# Altium PCB 630-DC2044B_REV01_DESIGN_LAYOUT.PcbDoc (part 1 of 2)
Units mil, origin at the board's own origin, x right, y up, seen from the top; angles counter-clockwise.
Board outline 3850 x 4475 mil, 4 copper layers (L1-TOP, L2- PGND/SGND-PLANE, L3-PGND/SGND-PLANE, L4-BOTTOM), stack 63.2 mil thick; 129 components, 57 nets, 276 pads, 188 vias.
Unrouted connection lines stored in the file: 3.
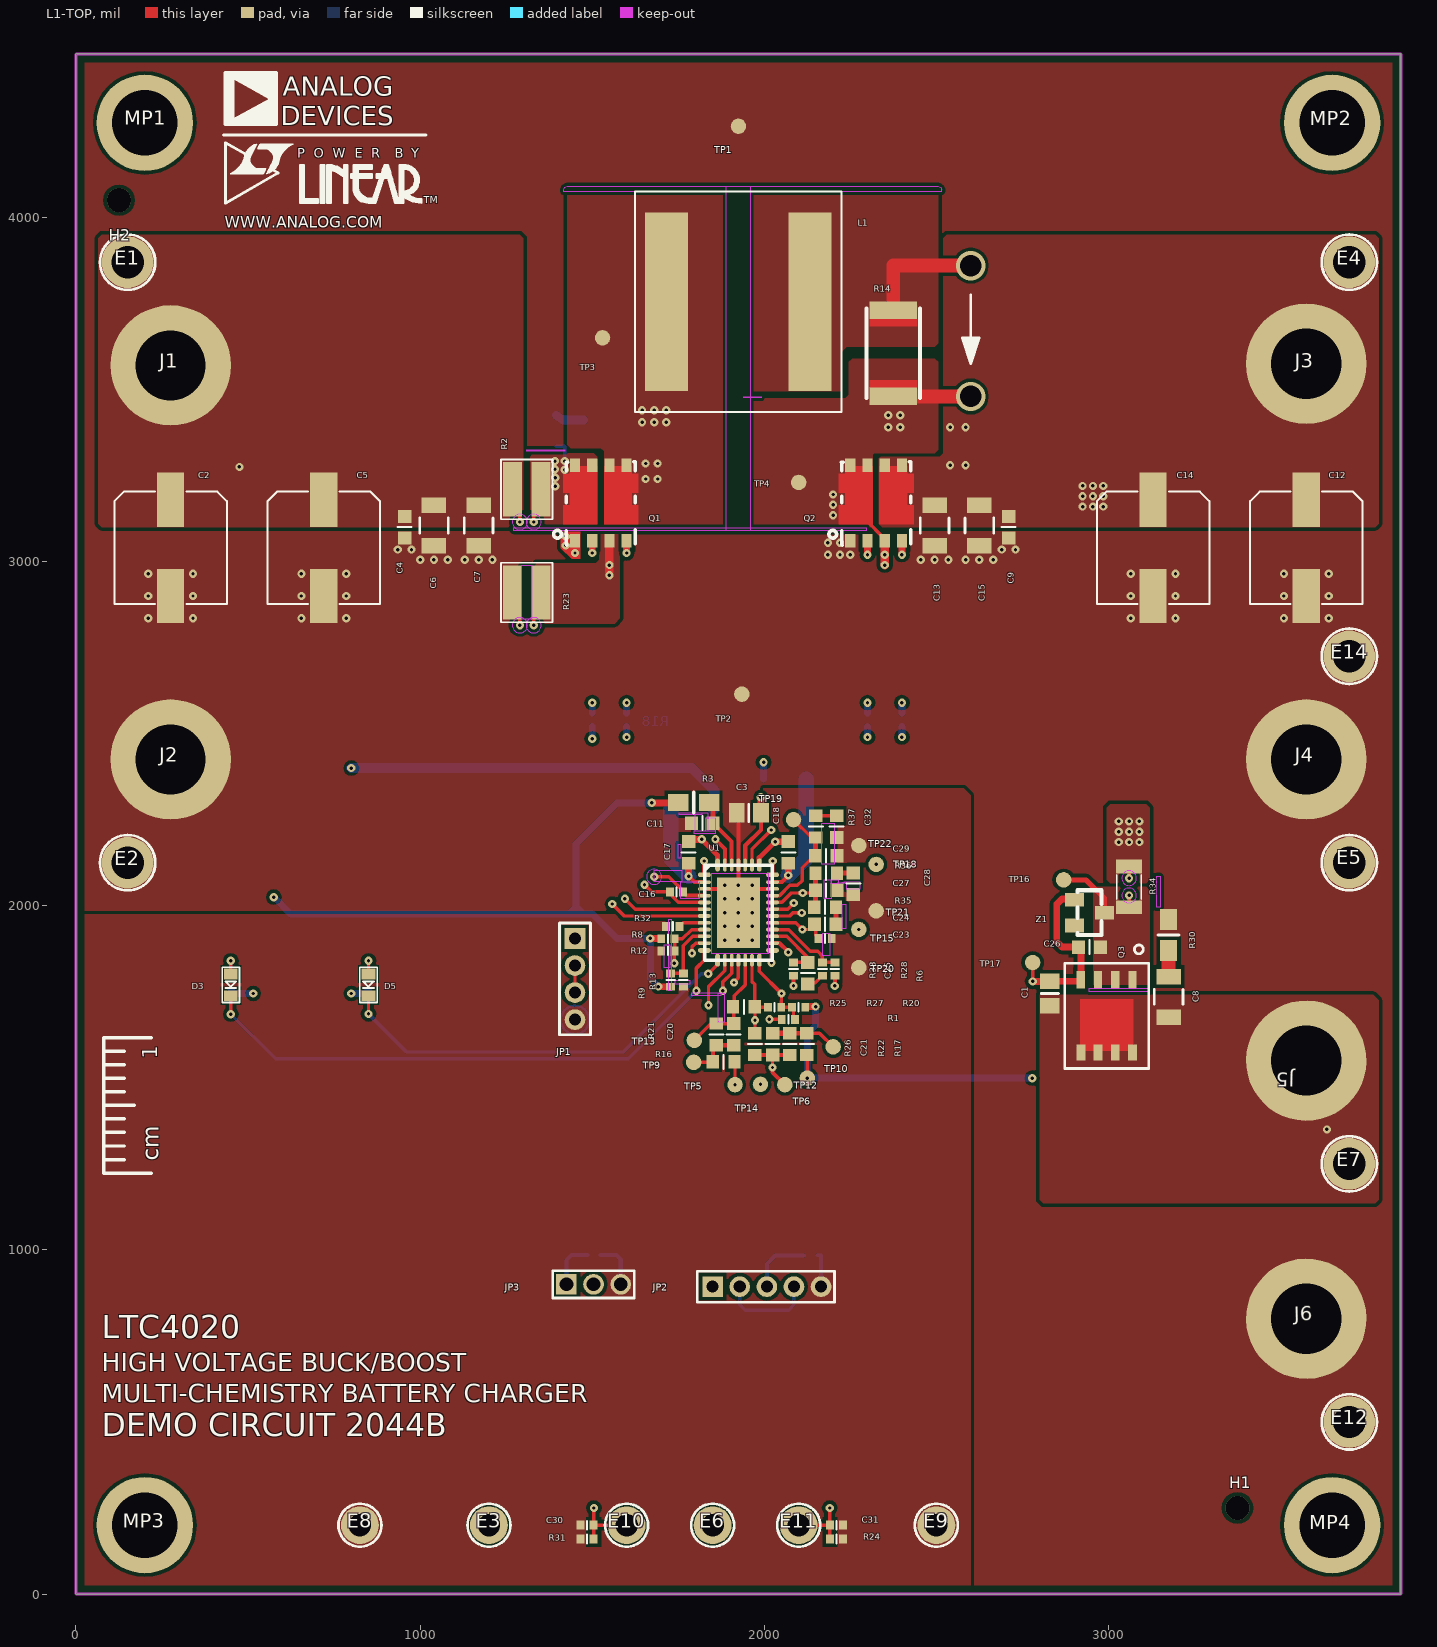
[diagram p0: L1-TOP view]
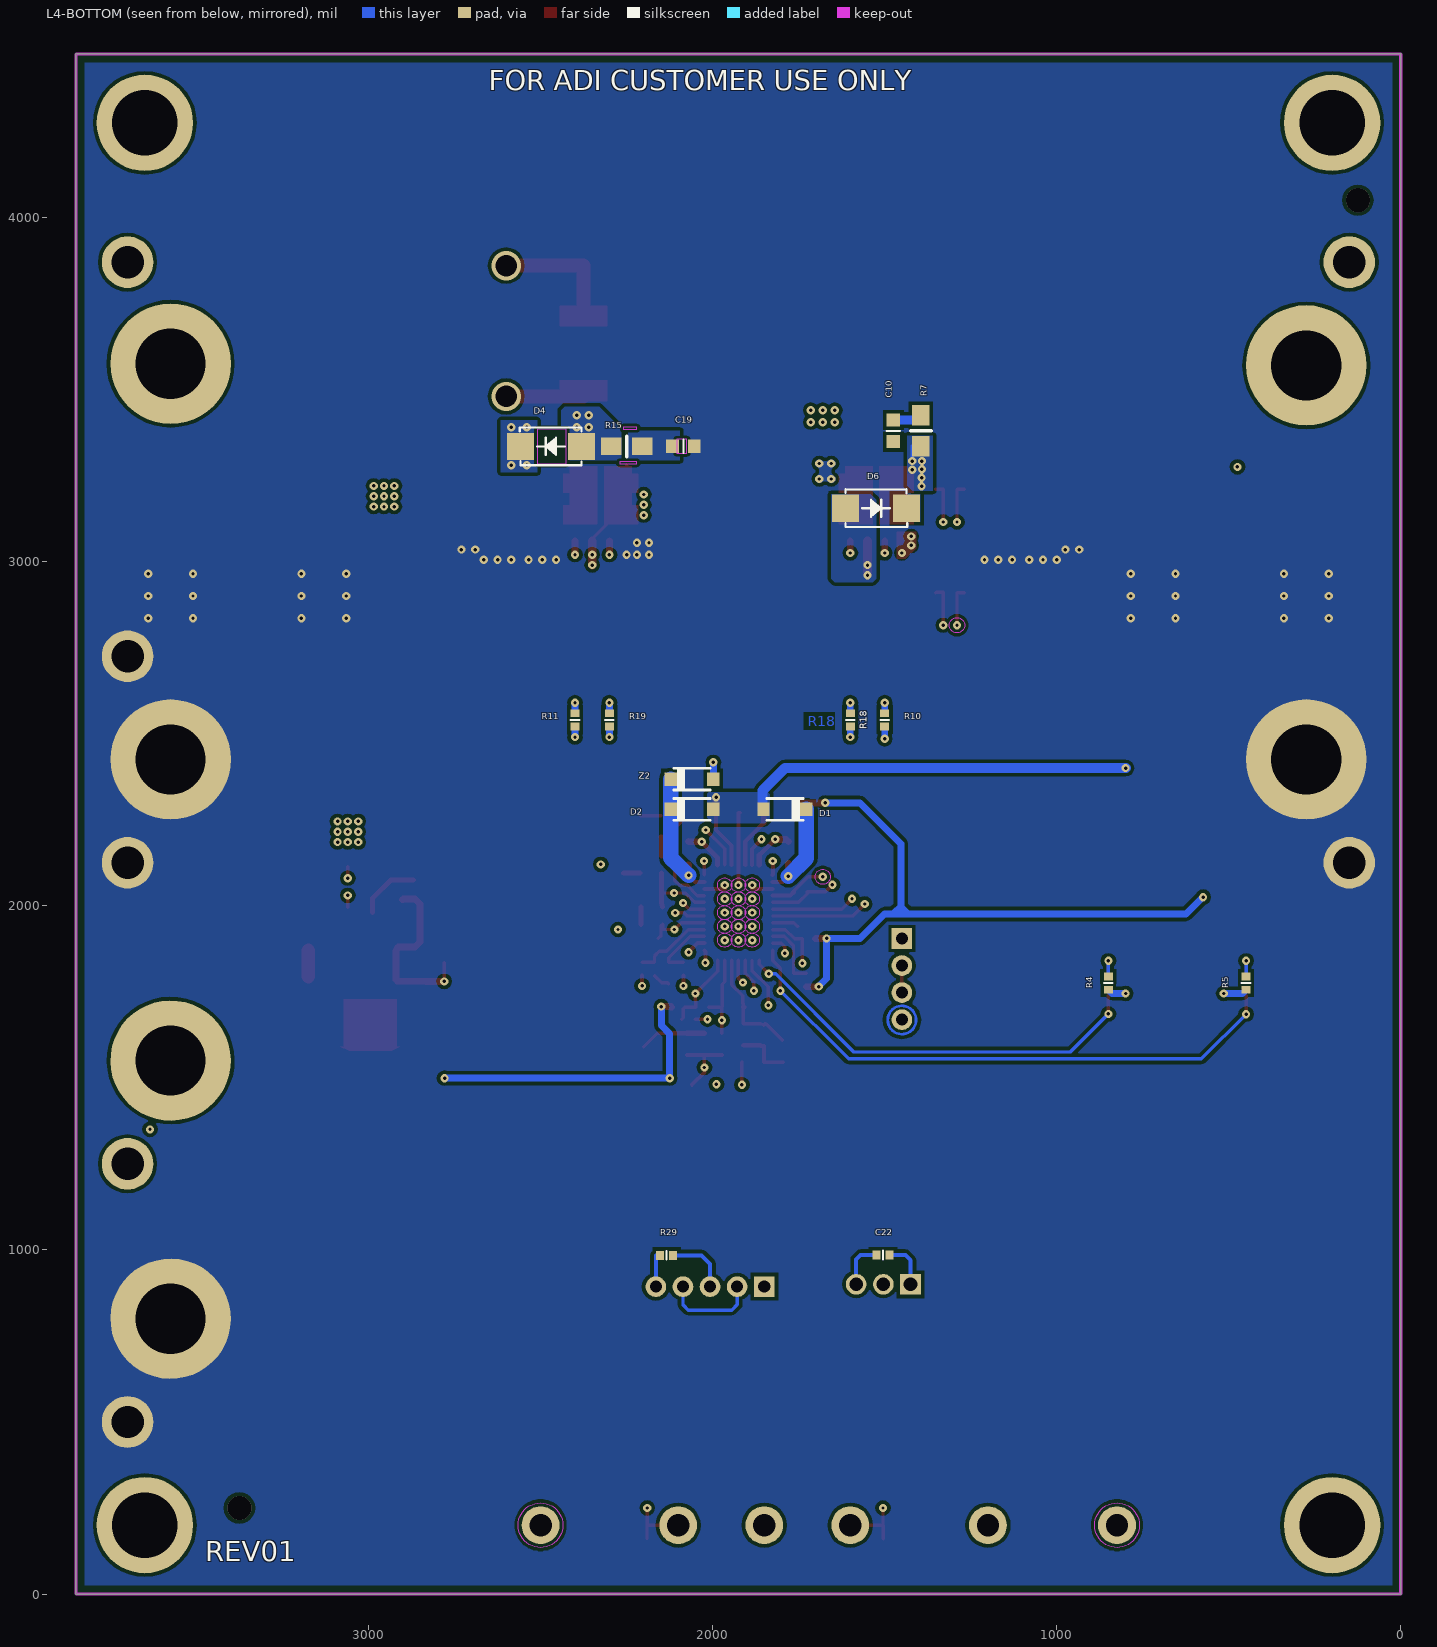
[diagram p1: L4-BOTTOM view, seen from below]
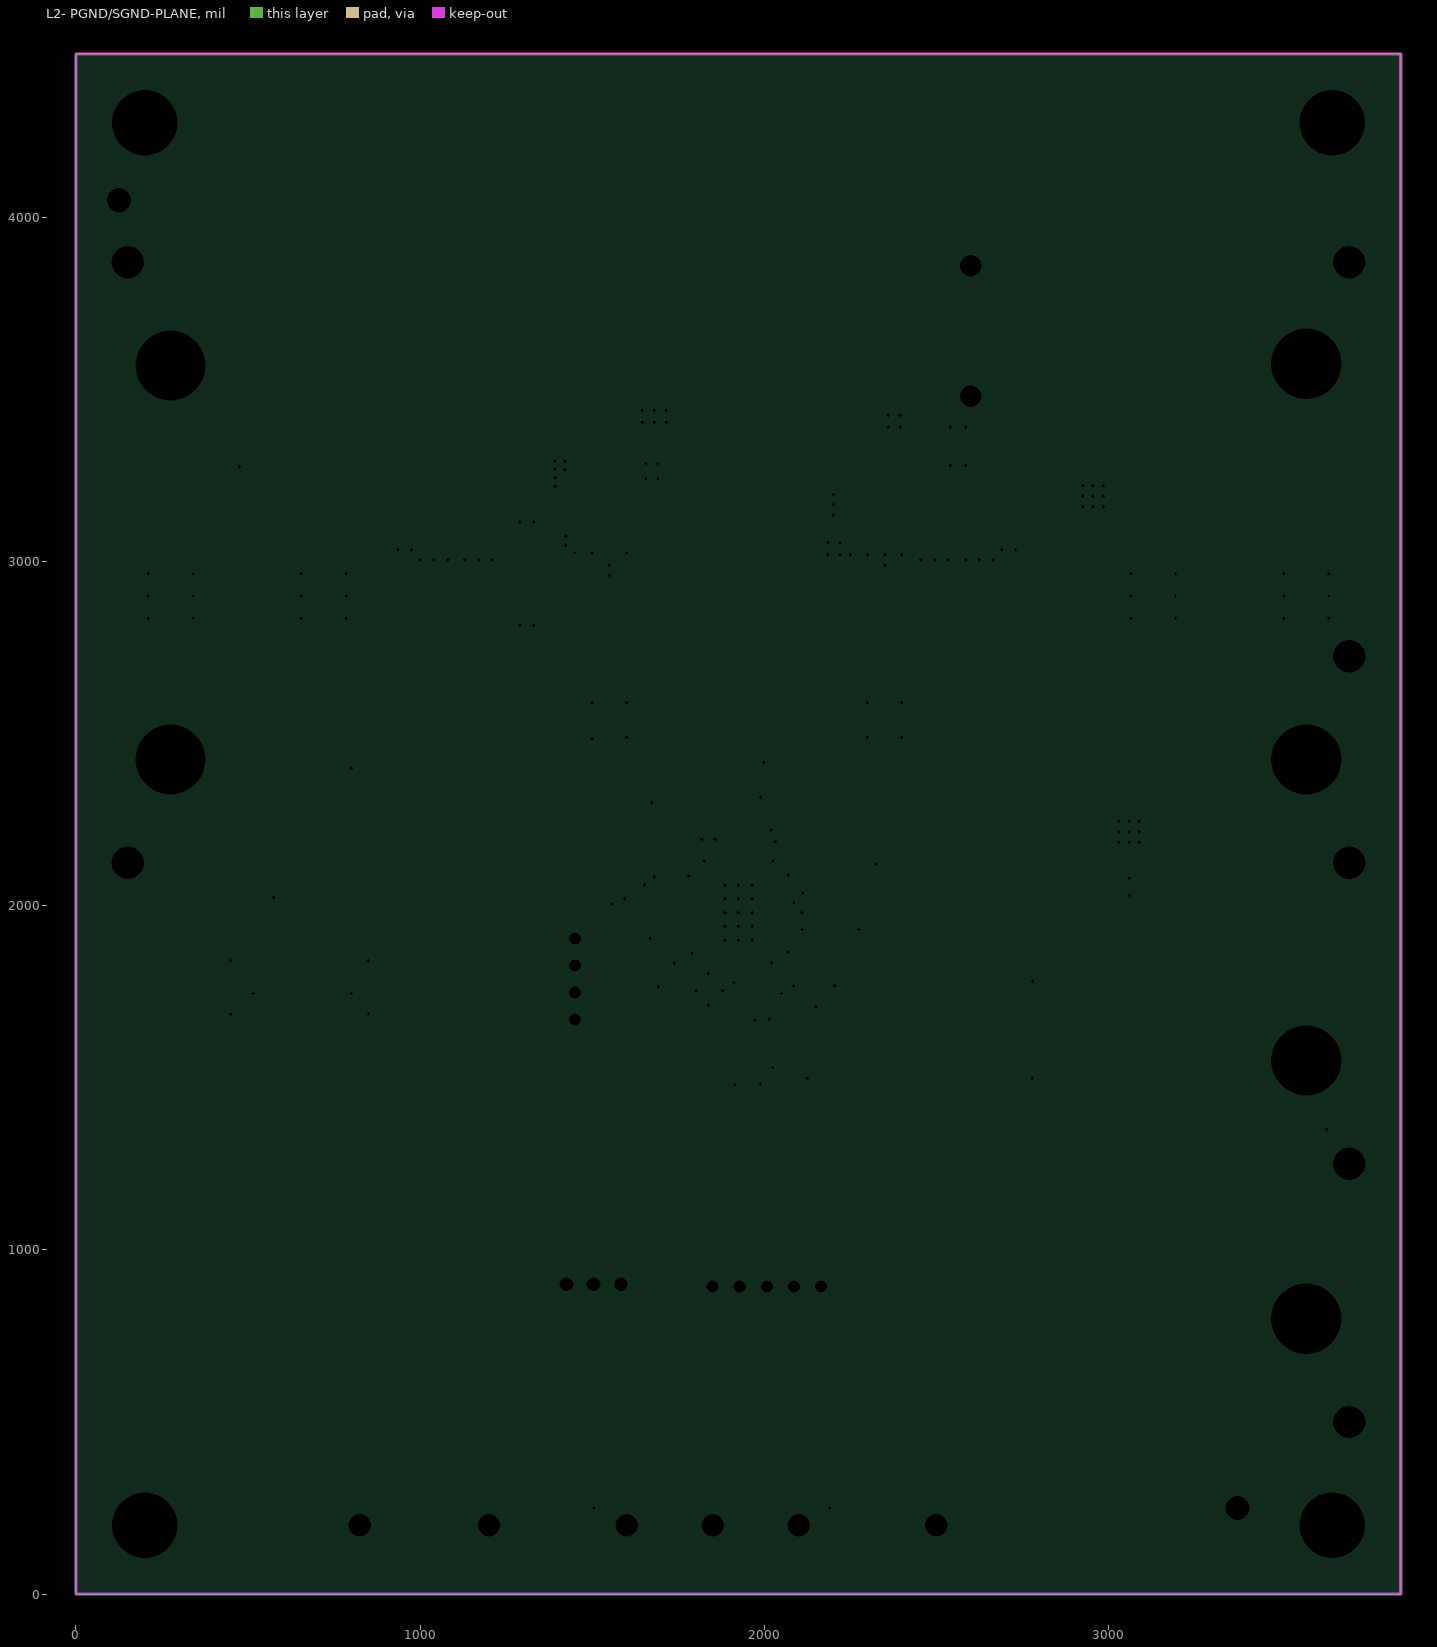
[diagram p2: L2- PGND/SGND-PLANE, clearances drawn from the general rule]
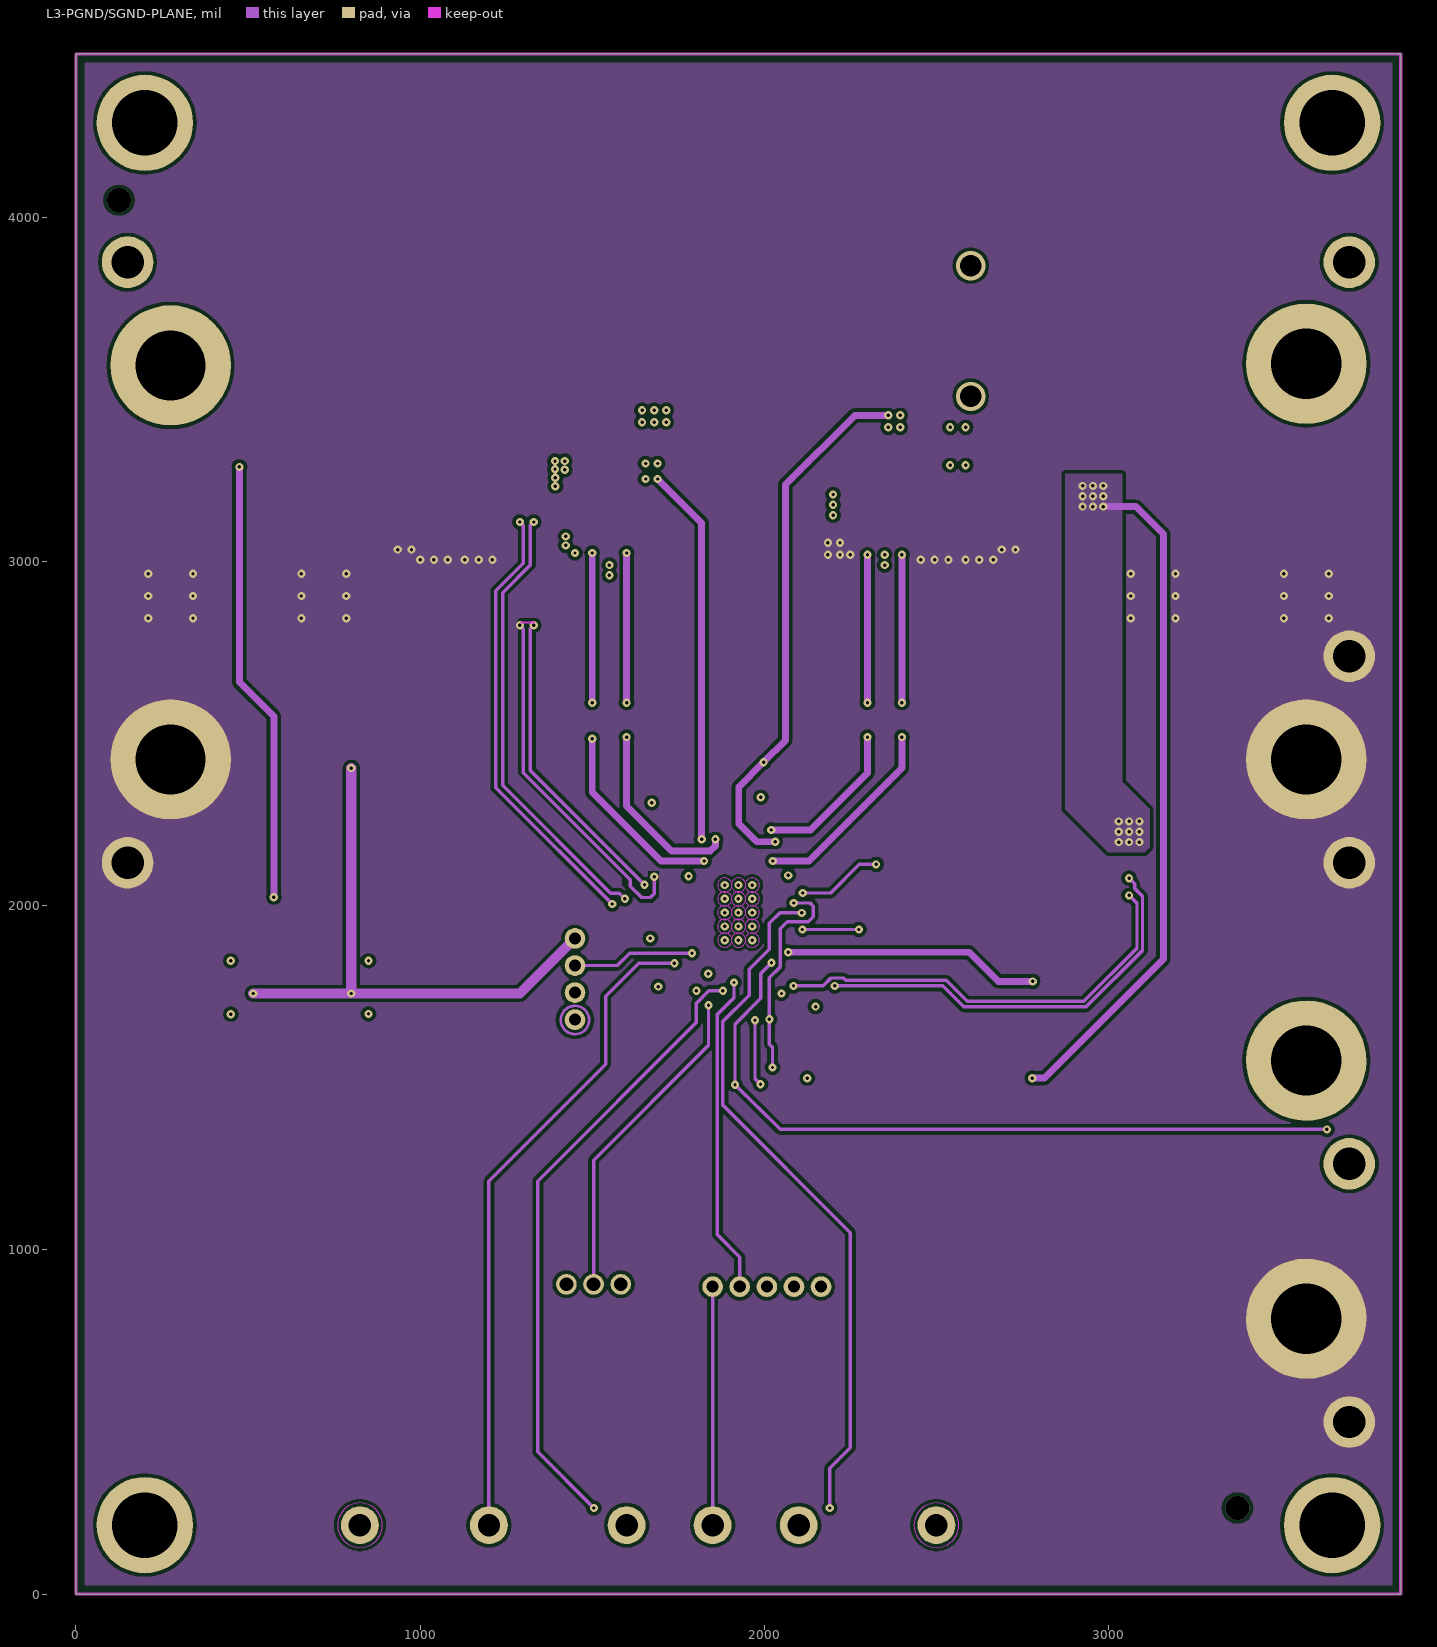
[diagram p3: L3-PGND/SGND-PLANE]

## Layer stack, top to bottom
Solder Mask Top: solder mask 0.4, Solder Resist, Dk 3.5
L1-TOP: signal copper 2.8
Dielectric 1: dielectric 12, FR-4, Dk 4.3
L2- PGND/SGND-PLANE: plane copper 2.8
Dielectric2: dielectric 28, FR-4, Dk 3.3
L3-PGND/SGND-PLANE: signal copper 2.8
Dielectric3: dielectric 12, FR-4, Dk 3.3
L4-BOTTOM: signal copper 2.8
Solder Mask Bottom: solder mask 0.4, Solder Resist, Dk 3.5

## Board outline
0,0 3850,0 3850,4475 0,4475

## Design rules (kind name [scope] priority, off if disabled: settings)
Clearance "Clearance - Net - INTVCC" [InNet('INTVCC')] p1: gap=6 ignorepadtopadclearanceinfootprint=FALSE except(9: Arc-Fill Arc-Poly Arc-Region Track-Fill Track-Poly Track-Region SMDPad-Fill SMDPad-Poly SMDPad-Region THPad-Fill THPad-Poly THPad-Region; 10: Arc-Hole Track-Hole SMDPad-Hole THPad-Hole Via-Fill Via-Poly Via-Region Via-Hole Fill-Fill Fill-Poly Fill-Region Fill-Hole Poly-Poly Poly-Region Poly-Hole Region-Region Region-Hole Text-Text Text-Hole)
Clearance "Clearance - Default - DEFAULT - Via" [IsVia vs IsVia] p2: gap=6 ignorepadtopadclearanceinfootprint=FALSE
Clearance "Clearance - Default - DEFAULT- SMD" [IsVia vs IsSMTPin] p3: gap=6 ignorepadtopadclearanceinfootprint=FALSE
Clearance "Clearance - Default - DEFAULT - Net" [All] p4: gap=10 ignorepadtopadclearanceinfootprint=FALSE except(6: Arc-Arc Arc-Track Arc-SMDPad Arc-THPad Arc-Via Arc-Text Track-Track Track-SMDPad Track-THPad Track-Via Track-Text SMDPad-SMDPad SMDPad-THPad SMDPad-Via SMDPad-Text THPad-THPad THPad-Via THPad-Text Via-Via Via-Text Fill-Text Poly-Text Region-Text)
ComponentClearance "ComponentClearance - Default - DEFAULT" [All] p1: gap=6 collisioncheckmode=3 verticalgap=10 showdistances=FALSE
FanoutControl Fanout_SOIC [IsSOIC] p1: bgadir=Out bgaviamode=Centered fanoutstyle=Auto fanoutdirection=Alternating viagrid=1 // Fanout_SOIC (Default Rule)
FanoutControl Fanout_Small [(CompPinCount < 5)] p2: bgadir=Out bgaviamode=Centered fanoutstyle=Auto fanoutdirection=OutThenIn viagrid=1 // Fanout_Small (Default Rule)
FanoutControl Fanout_LCC [IsLCC] p3: bgadir=Out bgaviamode=Centered fanoutstyle=Auto fanoutdirection=Alternating viagrid=1 // Fanout_LCC (Default Rule)
FanoutControl Fanout_BGA [IsBGA] p4: bgadir=Out bgaviamode=Centered fanoutstyle=Auto fanoutdirection=Alternating viagrid=1 // Fanout_BGA (Default Rule)
HoleToHoleClearance "HoleToHoleClearance - Default - DEFAULT" [All] p1: gap=6 allowstackedmicrovias=TRUE
Length "Default Length" [All] p1: maxlimit=50000 minlimit=0
MaxMinImpedance "Default Impedance" [All] p1: minimum=50.00 maximum=150.0
ParallelSegment "Default Parallel Segment Adjasent" [All] p1: limit=1000 gap=200
ParallelSegment "Default Parallel Segment Same Layer" [All] p2: limit=1000 gap=200
PlaneClearance [All] p1: clearance=20
PlaneConnect "Default PlaneConnect" [All] p1: planeconnectstyle=Direct reliefexpansion=20 reliefentries=4 reliefconductorwidth=15 reliefairgap=10
PolygonConnect "PolygonConnect - Default SMT" [IsSMTPin] p1: connectstyle=Direct reliefconductorwidth=10 reliefentries=4 polygonreliefangle="45 Angle" airgapwidth=10
PolygonConnect "PolygonConnect - Default Pad" [All] p2: connectstyle=Direct reliefconductorwidth=15 reliefentries=4 polygonreliefangle="45 Angle" airgapwidth=10
RoutingLayers "RoutingLayers - Default - DEFAULT" [All] p1: top layer_v5=TRUE mid layer 1_v5=TRUE bottom layer_v5=TRUE
RoutingPriority "RoutingPriority - Default - DEFAULT" [All] p1: routingpriority=4
RoutingTopology "Default Routing Topology" [All] p1: topology=Shortest
RoutingVias "RoutingVias - Default - DEFAULT" [All] p1: holewidth=63 width=85 viastyle="Through Hole" minholewidth=63 minwidth=85 maxholewidth=63 maxwidth=85
SMDToCorner "SMDToCorner - Default - DEFAULT" [All] p1: distance=60000
SolderMaskExpansion "SolderMaskExpansion from CAM settings" [All] p1: expansion=1 istentingtop=FALSE
Width "Width - Net - INTVCC" [InNet('INTVCC')] p1: maxlimit=100 minlimit=9 preferedwidth=10
Width "Width - NetClass - ClearanceClass_2(RuleSet)" [InNetClass('ClearanceClass_2(RuleSet)')] p2: maxlimit=100 minlimit=9 preferedwidth=10
Width "Default Width" [All] p3: maxlimit=100 minlimit=10 preferedwidth=10
19 further rules are at their usual default settings.

## Classes and differential pairs
net class ClearanceClass_2(RuleSet): BAT BST2 GND_POWER ILIMIT N16590650 QAD RNGSS SHDN VIN VOUT

## Components (designator, comment, footprint, x,y, rotation, side; value= is the part's Value field where it differs from the comment)
C1 "CC0805N" CC0805N 2830,1745 r270 top
C2 "PANASONIC_ZA_8X10.2" PANASONIC_ZA_8X10.2 275,3040 r0 top
C3 "CC0805N" CC0805N 1955,2270 r180 top
C4 "CC0603N" CC0603N 955,3100 r270 top
C5 "PANASONIC_ZA_8X10.2" PANASONIC_ZA_8X10.2 720,3040 r0 top
C6 "CC1206NB" CC1206NB 1040,3105 r270 top
C7 "CC1206NB" CC1206NB 1170,3105 r270 top
C8 "CC1206NAAA" CC1206NAAA 3175,1735 r90 top
C9 "CC0603N" CC0603N 2710,3100 r270 top
C10 "CC0603N" CC0603N 1475,3380 r90 bottom
C11 "CC0603N" CC0603N 1820,2240 r180 top
C12 "PANASONIC_ZA_8X10.2" PANASONIC_ZA_8X10.2 3575,3040 r0 top
C13 "CC1206NB" CC1206NB 2495,3105 r270 top
C14 "PANASONIC_ZA_8X10.2" PANASONIC_ZA_8X10.2 3130,3040 r0 top
C15 "CC1206NB" CC1206NB 2625,3105 r270 top
C16 "CC0402N" CC0402N 1745,2040 r0 top
C17 "CC0603NA" CC0603NA 1780,2155 r90 top
C18 "CC0603NA" CC0603NA 2070,2155 r90 top
C19 "CC0603ND" CC0603ND 2085,3335 r0 bottom
C20 "CC0603NA" CC0603NA 1911,1626 r90 top
C21 "CC0603NA" CC0603NA 2024,1598 r270 top
C22 "CC0402N" CC0402N 1505,985 r0 bottom
C23 "CC0402N" CC0402N 2177,1905 r0 top
C24 "CC0603NA" CC0603NA 2177,1946 r0 top
C25 "CC0603NA" CC0603NA 2127,1804 r90 top
C26 "CC0603NEA" CC0603NEA 2945,1880 r180 top
C27 "CC0603NA" CC0603NA 2180,2045 r0 top
C28 "CC0603NABA" CC0603NABA 2259,2064 r270 top
C29 "CC0603NA" CC0603NA 2180,2145 r0 top
C30 "CC0402NAA" CC0402NAA 1485,200 r180 top
C31 "CC0402NAA" CC0402NAA 2210,200 r0 top
C32 "CC0603NA" CC0603NA 2210,2230 r270 top
D1 "SOD-123N" SOD-123N 1790,2280 r0 bottom
D2 "SOD-123N" SOD-123N 2060,2280 r180 bottom
D3 "LED_0603" LED_0603 450,1770 r270 top
D4 "SMA-N" SMA-N 2470,3335 r180 bottom
D5 "LED_0603" LED_0603 850,1770 r270 top
D6 "SMA-N" SMA-N 1525,3155 r0 bottom
E1 "MILLMAX2501" MILLMAX2501 150,3870 r0 top
E2 "MILLMAX2501" MILLMAX2501 150,2125 r0 top
E3 "MILLMAX2308" MILLMAX2308 1200,200 r0 top
E4 "MILLMAX2501" MILLMAX2501 3700,3870 r0 top
E5 "MILLMAX2501" MILLMAX2501 3700,2125 r0 top
E6 "MILLMAX2308" MILLMAX2308 1850,200 r0 top
E7 "MILLMAX2501" MILLMAX2501 3700,1250 r0 top
E8 "MILLMAX2308" MILLMAX2308 825,200 r0 top
E9 "MILLMAX2308" MILLMAX2308 2500,200 r0 top
E10 "MILLMAX2308" MILLMAX2308 1600,200 r0 top
E11 "MILLMAX2308" MILLMAX2308 2100,200 r0 top
E12 "MILLMAX2501" MILLMAX2501 3700,500 r0 top
E14 "MILLMAX2501" MILLMAX2501 3700,2725 r0 top
H1 "PAD070-070" PAD070-070 3375,250 r0 top
H2 "PAD070-070" PAD070-070 125,4050 r0 top
J1 "KEY-575-4" KEY-575-4 275,3570 r0 top
J2 "KEY-575-4" KEY-575-4 275,2425 r0 top
J3 "KEY-575-4" KEY-575-4 3575,3575 r0 top
J4 "KEY-575-4" KEY-575-4 3575,2425 r0 top
J5 "KEY-575-4" KEY-575-4 3575,1550 r359 top
J6 "KEY-575-4" KEY-575-4 3575,800 r1 top
JP1 "HD1X4-079" HD1X4-079 1450,1905 r270 top
JP2 "HD1X5-079" HD1X5-079 1850,893 r0 top
JP3 "HD1X3-079" HD1X3-079 1425,900 r0 top
L1 "COILCRAFT-XAL1510" COILCRAFT-XAL1510 1925,3755 r0 top
MP1 "MTG-8831" MTG-8831 200,4275 r0 top
MP2 "MTG-8831" MTG-8831 3650,4275 r0 top
MP3 "MTG-8831" MTG-8831 200,200 r0 top
MP4 "MTG-8831" MTG-8831 3650,200 r0 top
Q1 "ONSEMI-DFN8-SO-8FL" ONSEMI-DFN8-SO-8FL 1525,3170 r0 top
Q2 "ONSEMI-DFN8-SO-8FL" ONSEMI-DFN8-SO-8FL 2325,3170 r0 top
Q3 "VISHAY_PPAK_SO-8" VISHAY_PPAK_SO-8 2995,1680 r270 top
R1 "CR0402N" CR0402N 2070,1670 r180 top
R2 "SUSUMU-PRL1632" SUSUMU-PRL1632 1310,3210 r0 top
R3 "CR0805M" CR0805M 1795,2300 r0 top
R4 "CR0402N" CR0402N 850,1775 r90 bottom
R5 "CR0402N" CR0402N 450,1775 r90 bottom
R6 "CR0402N" CR0402N 2205,1816 r270 top
R7 "CR0805M" CR0805M 1395,3380 r270 bottom
R8 "CR0402N" CR0402N 1720,1904 r0 top
R9 "CR0402N" CR0402N 1728,1784 r90 top
R10 "CR0402N" CR0402N 1500,2540 r90 bottom
R11 "CR0402N" CR0402N 2400,2540 r90 bottom
R12 "CR0402N" CR0402N 1720,1869 r180 top
R13 "CR0402N" CR0402N 1765,1784 r270 top
R14 "VISHAY-WSL_9-2512" VISHAY-WSL_9-2512 2375,3605 r270 top
R15 "CR0805M" CR0805M 2249.97,3335 r0 bottom
R16 "CR0603NA" CR0603NA 1882,1546 r180 top
R17 "CR0603NA" CR0603NA 2124,1598 r90 top
R18 "CR0402N" CR0402N 1600,2540 r90 bottom
R19 "CR0402N" CR0402N 2300,2540 r90 bottom
R20 "CR0402N" CR0402N 2100,1705 r180 top
R21 "CR0603NA" CR0603NA 1861,1626 r90 top
R22 "CR0603NA" CR0603NA 2074,1598 r270 top
R23 "SUSUMU-PRL1632" SUSUMU-PRL1632 1310,2910 r180 top
R24 "CR0402NAAAA" CR0402NAAAA 2210,160 r0 top
R25 "CR0603NA" CR0603NA 1941,1706 r0 top
R26 "CR0603NA" CR0603NA 1973,1598 r90 top
R27 "CR0402N" CR0402N 2030,1705 r180 top
R28 "CR0402N" CR0402N 2169,1816 r270 top
R29 "CR0402N" CR0402N 2134,984 r0 bottom
R30 "CR0805MAA" CR0805MAA 3175,1915 r90 top
R31 "CR0402NAAAA" CR0402NAAAA 1485,160 r180 top
R32 "CR0402N" CR0402N 1734,1940 r180 top
R33 "CR0402N" CR0402N 2085,1816 r270 top
R34 "SUSUMU-KRL1632" SUSUMU-KRL1632 3060,2055 r270 top
R35 "CR0603NA" CR0603NA 2177,1996 r180 top
R36 "CR0603NA" CR0603NA 2180,2095 r0 top
R37 "CR0603NA" CR0603NA 2150,2230 r90 top
TP1 "PADSTYLE1C" PADSTYLE1C 1925,4265 r0 top
TP2 "PADSTYLE1C" PADSTYLE1C 1935,2615 r0 top
TP3 "PADSTYLE1" PADSTYLE1 1530,3650 r0 top
TP4 "PADSTYLE1" PADSTYLE1 2100,3230 r0 top
TP5 "PADSTYLE1" PADSTYLE1 1915,1480 r0 top
TP6 "PADSTYLE1" PADSTYLE1 2125,1499 r0 top
TP9 "PADSTYLE1" PADSTYLE1 1795,1545 r0 top
TP10 "PADSTYLE1" PADSTYLE1 2200,1590 r0 top
TP12 "PADSTYLE1" PADSTYLE1 2060,1480 r0 top
TP13 "PADSTYLE1" PADSTYLE1 1797,1609 r0 top
TP14 "PADSTYLE1" PADSTYLE1 1989,1481 r0 top
TP15 "PADSTYLE1" PADSTYLE1 2275,1931 r0 top
TP16 "PADSTYLE1" PADSTYLE1 2870,2075 r270 top
TP17 "PADSTYLE1" PADSTYLE1 2780,1835 r270 top
TP18 "PADSTYLE1" PADSTYLE1 2325,2120 r0 top
TP19 "PADSTYLE1" PADSTYLE1 2085,2250 r0 top
TP20 "PADSTYLE1A" PADSTYLE1A 2275,1820 r0 top
TP21 "PADSTYLE1B" PADSTYLE1B 2325,1985 r0 top
TP22 "PADSTYLE1C" PADSTYLE1C 2275,2175 r0 top
U1 "LTC-QFN-38-1701" LTC-QFN-38-1701 1925,1980 r0 top
Z1 "SOT23-3NAA" SOT23-3NAA 2945,1980 r270 top
Z2 "SOD-123N" SOD-123N 2060,2368 r180 bottom

## Footprints (in the part's own frame and the unit in brackets; to place one, negate y for a bottom-side part, rotate by r counter-clockwise, add the part's x,y. Pads: shape width x height; smd on the part's side, far side on the other; paste and mask are expansions set on the pad)
CC0402N [mm]
  rect 0.58x0.66 smd: 1(-0.49,0) 2(0.49,0)
  silkscreen extent 0,-0.32 0,0.32
CC0402NAA [mm]
  rect 0.58x0.66 smd: 1(-0.49,0) 2(0.49,0)
  silkscreen extent 0,-0.32 0,0.32
CC0603N [mm]
  rect 0.95x1 smd: 1(-0.8,0) 2(0.8,0)
  silkscreen extent 0,-0.51 0,0.51
CC0603NA [mm]
  rect 0.95x1 smd: 1(-0.8,0) 2(0.8,0)
  silkscreen extent 0,-0.51 0,0.51
CC0603NABA [mm]
  rect 0.95x1 smd: 1(-0.8,0) 2(0.8,0)
  silkscreen extent 0,-0.51 0,0.51
CC0603ND [mm]
  rect 0.95x1 smd: 1(-0.8,0) 2(0.8,0)
  silkscreen extent 0,-0.51 0,0.51
CC0603NEA [mm]
  rect 0.95x1 smd: 1(-0.8,0) 2(0.8,0)
  silkscreen extent 0,-0.51 0,0.51
CC0805N [mm]
  rect 1.15x1.45 smd: 1(-0.9,0) 2(0.9,0)
  silkscreen extent 0,-0.64 0,0.64
CC1206NAAA [mm]
  rect 1.15x1.8 smd: 1(-1.5,0) 2(1.5,0)
  silkscreen extent -0.55,-1.05 0.55,1.05
CC1206NB [mm]
  rect 1.15x1.8 smd: 1(-1.5,0) 2(1.5,0)
  silkscreen extent -0.55,-1.05 0.55,1.05
COILCRAFT-XAL1510 [mil]
  rect 125x520 smd: 1(-208.5,0) 2(208.5,0)
  silkscreen extent -300,-320 300,320
CR0402N [mm]
  rect 0.58x0.66 smd: 1(-0.49,0) 2(0.49,0)
  silkscreen extent 0,-0.32 0,0.32
CR0402NAAAA [mm]
  rect 0.58x0.66 smd: 1(-0.49,0) 2(0.49,0)
  silkscreen extent 0,-0.32 0,0.32
CR0603NA [mm]
  rect 0.9x1 smd: 1(-0.8,0) 2(0.8,0)
  silkscreen extent 0,-0.51 0,0.51
CR0805M [mil]
  rect 60x50 smd: 1(-45,0) 2(45,0)
  silkscreen extent 0,-30 0,30
CR0805MAA [mil]
  rect 60x50 smd: 1(-45,0) 2(45,0)
  silkscreen extent 0,-30 0,30
HD1X3-079 [mil]
  rect 60x60 / inner round 60 / far side rect 60x60 hole 40: 1(0,0)
  round 60 hole 40: 2(79,0) 3(158,0)
  silkscreen extent -40,-40 198,40
HD1X4-079 [mil]
  rect 60x60 / inner round 60 / far side rect 60x60 hole 35: 1(0,0)
  round 60 hole 35: 2(78.74,0) 3(157.48,0) 4(236.22,0)
  silkscreen extent -45,-45 280,45
HD1X5-079 [mil]
  rect 60x60 / inner round 60 / far side rect 60x60 hole 35: 1(0,0)
  round 60 hole 35: 2(78.74,0) 3(157.48,0) 4(236.22,0) 5(314.96,0)
  silkscreen extent -45,-45 354,45
KEY-575-4 [mil]
  round 350 hole 204: 1(0,0)
LED_0603 [mm]
  rect 0.8x1 smd: 1(0.8,0) 2(-0.8,0)
  silkscreen extent -1.3,-0.64 1.3,0.64
LTC-QFN-38-1701 [mm]
  oval 0.95x0.35 smd: 1(-2.515,2.79) 12(-2.515,-2.79) 20(2.515,-2.79) 31(2.515,2.79)
  oval 0.95x0.27 smd: 2(-2.515,2.25) 3(-2.515,1.75) 4(-2.515,1.25) 5(-2.515,0.75) 6(-2.515,0.25) 7(-2.515,-0.25) 8(-2.515,-0.75) 9(-2.515,-1.25) 10(-2.515,-1.75) 11(-2.515,-2.25) 21(2.515,-2.25) 22(2.515,-1.75) 23(2.515,-1.25) 24(2.515,-0.75) 25(2.515,-0.25) 26(2.515,0.25) 27(2.515,0.75) 28(2.515,1.25) 29(2.515,1.75) 30(2.515,2.25)
  oval 0.35x0.95 smd: 13(-1.54,-3.515) 19(1.54,-3.515) 32(1.54,3.515) 38(-1.54,3.515)
  oval 0.27x0.95 smd: 14(-1,-3.515) 15(-0.5,-3.515) 16(0,-3.515) 17(0.5,-3.515) 18(1,-3.515) 33(1,3.515) 34(0.5,3.515) 35(0,3.515) 36(-0.5,3.515) 37(-1,3.515)
  rect 3.2x5.2 smd: 39(0,0)
  silkscreen extent -2.5,-3.5 2.5,3.5
MILLMAX2308 [mil]
  round 110 hole 65: 1(0,0)
  silkscreen extent -62,-62 62,62
MILLMAX2501 [mil]
  round 150 hole 94: 1(0,0)
  silkscreen extent -80,-80 80,80
MTG-8831 [mil]
  round 280 hole 190: 1(0,0)
ONSEMI-DFN8-SO-8FL [mm]
  rect 0.75x1 smd: 1(-1.905,-2.795) 2(-0.635,-2.795) 3(0.635,-2.795) 4(1.905,-2.795) 5(1.905,2.795) 6(0.635,2.795) 7(-0.635,2.795) 8(-1.905,2.795)
  L1-TOP region: -0.25,-1.55 -0.25,2.735 -2.285,2.735 -2.285,2.15 -2.775,2.15 -2.775,0.75 -2.28,0.75 -2.28,-0.15 -2.775,-0.15 -2.775,-1.55 -0.25,-1.55
  L1-TOP region: 0.25,-1.55 0.25,2.735 2.285,2.735 2.285,2.15 2.775,2.15 2.775,0.75 2.28,0.75 2.28,-0.15 2.775,-0.15 2.775,-1.55 0.25,-1.55
  silkscreen extent -3.48,-3.1 2.55,3.05
PAD070-070 [mil]
  round 70 hole 70 unplated: 1(0,0)
PADSTYLE1 [mil]
  round 45 smd: 1(0,0)
PADSTYLE1A [mil]
  round 45 smd: 1(0,0)
PADSTYLE1B [mil]
  round 45 smd: 1(0,0)
PADSTYLE1C [mil]
  round 45 smd: 1(0,0)
PANASONIC_ZA_8X10.2 [mm]
  rect 2x4 smd: 1(0,3.55) 2(0,-3.55)
  silkscreen extent -4.15,-4.15 4.15,4.15
SMA-N [mm]
  rrect0% 2x2 smd: 1(-2.25,0) 2(2.25,0)
  silkscreen extent -2.3,-1.4 2.25,1.4
SOD-123N [mm]
  rect 0.9x1 smd: 1(-1.575,0) 2(1.575,0)
  silkscreen extent -1.35,-0.8 1.35,0.8
SOT23-3NAA [mm]
  rect 1x1.4 smd: 1(-0.95,-1.1) 2(0.95,-1.1) 3(0,1.1)
  silkscreen extent -1.65,-0.89 1.65,0.89
SUSUMU-KRL1632 [mm]
  rect 1x1.9 smd: 1(-1.5,0) 2(1.5,0)
  silkscreen extent -0.9,-0.9 0.9,0.9
SUSUMU-PRL1632 [mm]
  rect 1.4x4 smd: 1(-1.05,0) 2(1.05,0)
  silkscreen extent -1.9,-2.2 1.9,2.2
VISHAY-WSL_9-2512 [mm]
  rect 1.3x3.5 smd: 1(-3.175,0) 2(3.175,0)
  L1-TOP region: 2,1.75 3.522,1.75 3.522,-1.75 2,-1.75 2,1.75
  L1-TOP region: -3.522,1.75 -2,1.75 -2,-1.75 -3.522,-1.75 -3.522,1.75
  silkscreen extent -3.3,-1.98 3.3,1.98
VISHAY_PPAK_SO-8 [mm]
  rect 1.27x0.61 smd: 1(-2.667,1.905) 2(-2.667,0.635) 3(-2.667,-0.635) 4(-2.667,-1.905)
  rect 1.2x0.65 smd: 5(2.71,1.9) 6(2.7,0.635) 7(2.7,-0.635) 8(2.7,-1.9)
  L1-TOP region: 2.286,2.21 2.591,1.6 2.591,-1.6 2.286,-2.21 2.286,-1.956 -1.219,-1.956 -1.219,1.956 2.286,1.956 2.286,2.21
  silkscreen extent -5.23,-3.1 3.89,3.1

## Via types
v1: diameter 24, hole 10, L1-TOP to L4-BOTTOM, 186 vias
v2: diameter 85, hole 63, L1-TOP to L4-BOTTOM, 2 vias

## Nets (pads, with @x,y where several pads share a name; then routed paths per layer and width w, separated by ;. In a path a pad name is that pad's centre, name@x,y a point inside that pad or via, vN(x,y) a via of type N, cw(c..) or ccw(c..) an arc to the next point about the centre after c; other vN are vias at no path point)
BAT: C1.2 C8.1 E7.1 J5.1 Q3.5 Q3.6 Q3.7 Q3.8 R16.1 TP5.1 U1.20 | length 2275.5
  L1-TOP w10: R16.1@1913.5,1546 1915,1544.5 v1(1915,1480)
  L1-TOP w12: v1(2021,1834) 2021,1867.14 U1.20@2024.02,1870.16
  L3-PGND/SGND-PLANE w10: v1(2021,1834) 1990,1803 1990,1731 1915,1656 v1(1915,1480) 2046,1350 v1(3635,1350)
BG1: R18.1 U1.37 | length 654.2
  L1-TOP w12: v1(1858,2193) 1885.63,2165.37 U1.37@1885.63,2118.39
  L3-PGND/SGND-PLANE w20: v1(1600,2490) 1600,2290 1731,2159 1843,2159 1858,2174 v1(1858,2193)
  L4-BOTTOM w20: v1(1600,2490) R18.1@1600,2520.71
BG2: R19.1 U1.33 | length 609.1
  L1-TOP w10: U1.33@1964.37,2118.39 1964.37,2165 1965,2165 v1(2020,2220)
  L3-PGND/SGND-PLANE w20: v1(2020,2220) 2135,2220 2300,2385 v1(2300,2490)
  L4-BOTTOM w20: v1(2300,2490) R19.1@2300,2520.71
BGATE: C1.1 C26.2 Q3.4 TP17.1 U1.21 Z1.1 | length 1339.6
  L1-TOP w10: v1(2780,1780) TP17.1@2780,1835
  L1-TOP w12: U1.21@2024.02,1891.42 2043.58,1891.42 v1(2070,1865)
  L1-TOP w20: v1(2780,1780) 2834.57,1780 C1.1@2835,1780.43 ; C1.1@2830,1780.43 C1.1@2835,1780.43 ; Z1.1@2901.69,2017.4 2899.09,2020 2865,2020 2850,2005 2850,1895 2865,1880 C26.2@2913.5,1880 2920,1868.31 Q3.4@2920,1785 2915.43,1780.43 C1.1@2835,1780.43
  L3-PGND/SGND-PLANE w20: v1(2070,1865) 2595,1865 2680,1780 v1(2780,1780)
BST1: C17.1 D1.1 U1.2 | length 306.2
  L1-TOP w12: v1(1780,2086) 1797.42,2068.58 U1.2@1825.98,2068.58
  L1-TOP w20: v1(1780,2086) C17.1@1780,2123.5
  L4-BOTTOM w45: D1.1@1727.99,2280 1727.99,2138.01 v1(1780,2086)
BST2: C18.1 D2.1 U1.30 Z2.1 | length 397.8
  L1-TOP w10: C18.1@2070,2123.5 2075,2120 C18.1@2071,2119
  L1-TOP w12: U1.30@2024.02,2068.58 2051.58,2068.58 v1(2070,2088)
  L1-TOP w20: v1(2070,2088) 2070,2117.97 C18.1@2071,2118.97
  L4-BOTTOM w45: v1(2070,2088) 2117.01,2134.01 2122.01,2139.01 D2.1@2122.01,2280 Z2.1@2122.01,2368
CSN: C25.2 R33.1 U1.22 | length 184.3
  L1-TOP w10: U1.22@2024.02,1911.1 2064.9,1911.1 2127,1849 C25.2@2127,1835.5 2126.8,1835.29 R33.1@2085,1835.29
CSOUT: C23.1 C24.1 TP15.1 U1.24 | length 354.6
  L1-TOP w10: U1.24@2024.02,1950.47 2091.53,1950.47 v1(2111,1931) 2145.5,1931 C24.1@2145.5,1946 2150,1941.5 2150,1912.71 C23.1@2157.71,1905
  L3-PGND/SGND-PLANE w10: v1(2111,1931) v1(2275,1931)
CSP: R6.1 R28.1 U1.23 | length 231.5
  L1-TOP w10: U1.23@2024.02,1930.79 2071.21,1930.79 2134,1868 2155,1868 2169,1854 R28.1@2169,1835.29 R6.1@2205,1835.29
FBG: R25.2 R26.2 R27.2 TP14.1 U1.18 | length 441.9
  L1-TOP w10: U1.18@1964.37,1841.61 1964.37,1779.63 1972.5,1771.5 R25.2@1972.5,1706 1973.5,1705 R27.2@2010.71,1705 ; R26.2@1973,1629.5 v1(1973,1667) 1973,1700.78 R25.2@1973.26,1701.04
  L3-PGND/SGND-PLANE w10: v1(1973,1667) 1973,1497 v1(1989,1481)
GND_POWER: C2.2 C3.2 C4.2 C5.2 C6.2 C7.2 C9.2 C11.2 C12.2 C13.2 C14.2 C15.2 C16.2 C19.1 E2.1 E5.1 E12.1 E14.1 J2.1 J4.1 J6.1 Q2.1 R23.2 R30.2 TP1.1 TP2.1 U1.4 U1.35 | length 1475.1
  L1-TOP w10: R23.2@1268.66,2910 1290,2910 v1(1290,2815) ; v1(1680,2084) 1723,2084 1767,2040 C16.2@1764.29,2040 ; C3.2@1919.57,2270 C3.2@1925,2270
  L1-TOP w12: C16.2@1764.29,2040 1764.29,2039.21 1774.29,2029.21 U1.4@1825.98,2029.21 ; U1.35@1925,2118.39 C3.2@1925,2270
  L3-PGND/SGND-PLANE w10: v1(1290,2815) 1300,2805 1300,2387 1611,2076 1611,2057 1644,2024 1669,2024 1680,2035 v1(1680,2084)
  other v1: 210,2835 340,2835 655,2835 785,2835 3065,2835 3195,2835 3510,2835 3640,2835 210,2900 340,2900 655,2900 785,2900 3065,2900 3195,2900 3510,2900 3640,2900 210,2965 340,2965 655,2965 785,2965 3065,2965 3195,2965 3510,2965 3640,2965 1000,3005 1040,3005 1080,3005 1130,3005 1170,3005 1210,3005 2455,3005 2495,3005 2535,3005 2585,3005 2625,3005 2665,3005 2185,3020 2220,3020 2250,3020 935,3035 975,3035 2690,3035 2730,3035 2185,3055 2220,3055
GND_SIGNAL: C22.2 C23.2 C27.2 C28.2 C29.2 C30.2 C31.2 C32.2 E8.1 E9.1 JP1.4 JP2.5 JP3.3 R12.2 R13.2 R24.2 R29.2 R31.2 R32.2 TP20.1 TP21.1 TP22.1 U1.3 U1.29 U1.39 | length 381.2
  L1-TOP w10: U1.39@1872,2048.9 1886,2048.9 1886,2059 v1(1885,2060) ; U1.39@1965,2048.9 v1(1965,2060)
  L1-TOP w12: U1.3@1825.98,2048.9 U1.39@1872,2048.9 ; U1.39@1965,2048.9 U1.29@2024.02,2048.9
  L4-BOTTOM w10: R29.2@2153.29,984 2165.5,984 2164.96,983.46
  L4-BOTTOM w12: C22.2@1524.29,985 1570,985 1583,972 JP3.3@1583,900 ; JP2.5@2164.96,893 2164.96,983.46
  other v1: 1885,1900 1925,1900 1965,1900 1885,1940 1925,1940 1965,1940 1885,1980 1925,1980 1965,1980 1885,2020 1925,2020 1965,2020 1925,2060
ILIMIT: C31.1 E11.1 R24.1 U1.25 | length 2309.1
  L1-TOP w10: U1.25@2024.02,1970.16 2074.16,1970.16 2083,1979 v1(2109,1979) ; E11.1@2100,200 C31.1@2190.71,200 ; v1(2190,250) 2190,200.71 C31.1@2190.71,200 ; R24.1@2190.71,160 C31.1@2190.71,200
  L3-PGND/SGND-PLANE w10: v1(2109,1979) 2045,1979 2015,1949 2015,1874 1956,1815 1956,1740 1880,1664 1880,1420 2250,1050 2250,425 2190,365 v1(2190,250)
INTVCC: C3.1 D1.2 D2.2 JP1.1 R4.1 R5.1 U1.34 | length 3134.4
  L1-TOP w12: U1.34@1944.68,2118.39 1944.68,2174.68 1990.43,2220.43 C3.1@1990.43,2270
  L1-TOP w20: v1(1990,2315) 1990,2270.43 C3.1@1990.43,2270
  L3-PGND/SGND-PLANE w30: v1(515,1745) v1(800,1745) ; v1(800,2400) v1(800,1745) ; JP1.1@1450,1905 1290,1745 v1(800,1745)
  L4-BOTTOM w20: R5.1@450,1755.71 460.71,1745 v1(515,1745) ; v1(800,1745) 839.29,1745 R4.1@850,1755.71
  L4-BOTTOM w30: v1(800,2400) 1790,2400 1855,2335 1855,2282.01 D1.2@1852.01,2280
ITH: C27.1 R35.2 R36.1 TP18.1 U1.27 | length 482.6
  L1-TOP w10: U1.27@2024.02,2009.53 2051.53,2009.53 2079,2037 v1(2112,2037) C27.1@2148.5,2037
  L1-TOP w15: R35.2@2145.5,1996 2148.5,2007 2148.5,2037 C27.1@2148.5,2045 R36.1@2148.5,2095
  L3-PGND/SGND-PLANE w10: v1(2112,2037) 2193,2037 2194,2038 2276.1,2120 v1(2325,2120)
MODE: JP1.2 JP1.3 U1.11 | length 492.8
  L1-TOP w10: JP1.3@1450,1747.52 JP1.2@1450,1826.26 ; v1(1790,1862) 1790,1881 1800.42,1891.42 U1.11@1825.98,1891.42
  L3-PGND/SGND-PLANE w10: JP1.2@1450,1826.26 1573.26,1826.26 1609,1862 v1(1790,1862)
N16559762: C20.1 R16.2 R21.1 TP9.1 | length 165.8
  L1-TOP w10: TP9.1@1795,1545 1850.51,1545 1850.75,1545.24 1850.75,1545.76 R16.2@1850.5,1546
  L1-TOP w12: R16.2@1850.5,1546 1850.5,1591.95 1861.08,1591.95 R21.1@1861,1594.5 C20.1@1911,1594.5
N16563575: C32.1 R37.2 | length 60
  L1-TOP w10: R37.2@2150,2261.5 C32.1@2210,2261.5
N16563579: C28.1 R36.2 | length 47.7
  L1-TOP w15: R36.2@2211.5,2095 2258.5,2095 C28.1@2259,2095.5
N16567930: C24.2 R35.1 | length 50
  L1-TOP w15: C24.2@2208.5,1946 R35.1@2208.5,1996
N16574178: C21.1 R17.2 R22.1 TP10.1 | length 192.4
  L1-TOP w10: R17.2@2118,1629.5 R17.2@2124,1629.5 2160.5,1629.5 TP10.1@2200,1590
  L1-TOP w12: R22.1@2074,1629.5 R17.2@2118,1629.5
  L1-TOP w15: C21.1@2024,1629.5 R22.1@2074,1629.5
N16590650: C16.1 D6.2 Q1.3 R23.1 U1.5 | length 1312
  L1-TOP w10: v1(1330,2815) 1330,2911 1350.34,2911 R23.1@1351.34,2910 ; v1(1652,2061) 1673,2040 C16.1@1725.71,2040 1725.71,2034.29 1750.47,2009.53 U1.5@1825.98,2009.53
  L1-TOP w25: v1(1550,2960) v1(1550,2990) Q1.3@1550,3059.96
  L3-PGND/SGND-PLANE w10: v1(1330,2815) 1320,2805 1320,2393 v1(1652,2061)
N16591324: C10.2 R7.1 | length 84.1
  L4-BOTTOM w25: R7.1@1395,3425 1415,3411.5 C10.2@1475,3411.5
N16591456: C19.2 R15.1
N16600107: D3.1 U1.12 | length 1669
  L1-TOP w10: v1(450,1685) D3.1@450,1738.5 ; v1(1803,1753) 1803,1818.99 1825.98,1841.99 U1.12@1825.98,1870.16
  L4-BOTTOM w10: v1(450,1685) 580,1555 1605,1555 v1(1803,1753)
N16600116: D5.1 U1.13 | length 1230.8
  L1-TOP w10: v1(850,1685.5) D5.1@850,1738.5 ; v1(1837,1802) 1864.37,1829.37 U1.13@1864.37,1841.61
  L4-BOTTOM w10: v1(850,1685.5) 960.5,1575 1590,1575 1817,1802 v1(1837,1802)
N16621792: C26.1 Q3.1 Q3.2 Q3.3 R33.2 R34.2 TP16.1 Z1.3 | length 1508.3
  L1-TOP w10: R34.2@3060,1995.94 v1(3060,2030)
  L1-TOP w12: v1(2085,1767) R33.2@2085,1796.71
  L1-TOP w15: TP16.1@2870,2075 2935,2075 2988.31,2021.69 Z1.3@2988.31,1980
  L3-PGND/SGND-PLANE w10: v1(2085,1767) 2171,1767 2194,1790 2230,1790 2237,1783 2529,1783 2590,1722 2928,1722 3083,1877 3083,2007 v1(3060,2030)
N16768872: E6.1 JP2.1 | length 693
  L3-PGND/SGND-PLANE w10: E6.1@1850,200 JP2.1@1850,893
N16771108: L1.2 R14.1 | length 355
  L1-TOP w40: R14.1@2375,3730 2375,3860 v2(2600,3860)
N16813716: C22.1 JP3.1 | length 136.9
  L4-BOTTOM w12: JP3.1@1425,900 1425,970 1440,985 C22.1@1485.71,985
N16858640: C11.1 R3.2 U1.36 | length 193.9
  L1-TOP w12: C11.1@1851.5,2240 1905.32,2186.18 U1.36@1905.32,2118.39
  L1-TOP w15: C11.1@1851.5,2240 R3.2@1851.5,2290
N16860808: D5.2 R4.2 | length 84.2
  L1-TOP w10: D5.2@850,1801.5 v1(850,1840)
  L4-BOTTOM w10: R4.2@850,1794.29 v1(850,1840)
N16860845: D3.2 R5.2 | length 84.2
  L1-TOP w10: D3.2@450,1801.5 v1(450,1840)
  L4-BOTTOM w10: R5.2@450,1794.29 v1(450,1840)
N16865080: JP2.3 R29.1 | length 183.9
  L4-BOTTOM w12: JP2.3@2007.48,893 2007.48,959.48 2032,984 R29.1@2114.71,984
N16868558: C25.1 R28.2 | length 52
  L1-TOP w10: C25.1@2127,1772.5 2130.5,1776 2148.29,1776 R28.2@2169,1796.71
N16868867: Q1.2 R10.2 | length 500.7
  L1-TOP w20: v1(1500,3025) Q1.2@1500,3059.96
  L3-PGND/SGND-PLANE w20: v1(1500,2590) v1(1500,3025)
  L4-BOTTOM w20: R10.2@1500,2559.29 v1(1500,2590)
N16872134: Q2.4 R11.2 | length 500.7
  L1-TOP w20: v1(2400,3020) Q2.4@2400,3059.96
  L3-PGND/SGND-PLANE w20: v1(2400,2590) v1(2400,3020)
  L4-BOTTOM w20: R11.2@2400,2559.29 v1(2400,2590)
N16872774: Q2.2 R19.2 | length 500.7
  L1-TOP w20: v1(2300,3020) Q2.2@2300,3059.96
  L3-PGND/SGND-PLANE w20: v1(2300,2590) v1(2300,3020)
  L4-BOTTOM w20: R19.2@2300,2559.29 v1(2300,2590)
N16881464: C8.2 R30.1 | length 75.9
  L1-TOP w40: C8.2@3175,1794.06 R30.1@3175,1870
N16903155: Q1.4 R18.2 | length 500.7
  L1-TOP w20: v1(1600,3025) Q1.4@1600,3059.96
  L3-PGND/SGND-PLANE w20: v1(1600,2590) v1(1600,3025)
  L4-BOTTOM w20: R18.2@1600,2559.29 v1(1600,2590)
NTC: JP2.2 JP2.4 U1.16 | length 1275.8
  L1-TOP w10: v1(1912,1777) 1925,1790 U1.16@1925,1841.61
  L3-PGND/SGND-PLANE w10: v1(1912,1777) 1912,1733 1864,1685 1864,1044 1928.74,979 JP2.2@1928.74,893
  L4-BOTTOM w10: JP2.2@1928.74,893 1928.74,841.26 1945,825 2071.22,825 2086.22,840 JP2.4@2086.22,893
QAD: Q1.7 Q1.8 R2.2 R7.2 U1.6 | length 1722.1
  L1-TOP w10: v1(1330,3115) 1330,3210 R2.2@1351.34,3210 ; v1(1595,2020) 1625,1989.84 U1.6@1825.98,1989.84
  L3-PGND/SGND-PLANE w10: v1(1330,3115) 1320,3105 1320,2990 1240,2910 1240,2350 1550,2040 1550,2039.5 1553.5,2036 1579,2036 v1(1595,2020)
  L4-BOTTOM w10: R7.2@1395,3335 1420,3335 v1(1420,3292)
  other v1: 1393,3219 1393,3244 1420,3267 1392,3268 1392,3292
RNGSS: C30.1 E10.1 R31.1 U1.15 | length 2102.5
  L1-TOP w10: R31.1@1504.29,160 C30.1@1504.29,200 ; v1(1505,250) 1505,200.71 C30.1@1504.29,200 ; E10.1@1600,200 C30.1@1504.29,200 ; v1(1880,1753) 1880,1779 1905.32,1804.32 U1.15@1905.32,1841.61
  L3-PGND/SGND-PLANE w10: v1(1505,250) 1342,413 1342,1200 1803,1661 1803,1717 1839,1753 v1(1880,1753)
RT: R32.1 U1.8 | length 77
  L1-TOP w10: R32.1@1753.29,1940 1753.82,1940 1764.29,1950.47 U1.8@1825.98,1950.47
SHDN: E3.1 R8.2 R12.1 U1.9 | length 2089.2
  L1-TOP w10: v1(1739,1833) R12.1@1739,1866 ; U1.9@1825.98,1930.79 1788.79,1930.79 1762,1904 R8.2@1739.29,1904 R12.1@1739.29,1869 ; R12.1@1739,1866 1739,1868.71 R12.1@1739.29,1869 ; R12.1@1739,1866 1739.29,1866.29 R12.1@1739.29,1869
  L3-PGND/SGND-PLANE w10: E3.1@1200,200 1200,1200 1539,1539 1539,1737 1635,1833 v1(1739,1833)
SW1: C10.1 C17.2 D6.1 L1.1 Q1.1 Q1.5 Q1.6 TP3.1 U1.38 | length 1309.5
  L1-TOP w10: v1(1423,3047) 1423,3059.96 Q1.1@1450,3059.96 v1(1450,3025)
  L1-TOP w15: v1(1818,2193) 1864.37,2146.63 U1.38@1864.37,2118.39
  L1-TOP w20: C17.2@1780,2186.5 1786.5,2193 v1(1818,2193)
  L3-PGND/SGND-PLANE w20: v1(1690,3240) 1818,3112 v1(1818,2193)
  other v1: 1423,3073 1655,3240 1655,3285 1690,3285 1645,3405 1680,3405 1715,3405 1645,3440 1680,3440 1715,3440
SW2: C18.2 D4.2 Q2.3 Q2.7 Q2.8 R14.2 R15.2 TP4.1 U1.32 Z2.2 | length 2314.2
  L1-TOP w10: Q2.8@2250,3280.04 2245,3117 2299,3117 2345,3071 Q2.3@2350,3059.96
  L1-TOP w15: U1.32@1985.63,2118.39 1985.63,2139.63 v1(2032,2186)
  L1-TOP w20: v1(2032,2186) 2064.5,2186 C18.2@2070,2186.5
  L1-TOP w25: v1(2350,2990) v1(2350,3020) Q2.3@2350,3059.96
  L1-TOP w40: R14.2@2375,3480 v2(2600,3480)
  L3-PGND/SGND-PLANE w20: v1(2032,2186) 1978,2186 1926,2238 1926,2345 v1(1998,2417) 2061.5,2480.5 2061.5,3223.5 2263,3425 v1(2360,3425)
  L4-BOTTOM w20: Z2.2@1997.99,2368 v1(1998,2417)
  other v1: 2200,3135 2200,3165 2200,3195 2360,3390 2395,3390 2395,3425
TG1: R10.1 U1.1 | length 639.1
  L1-TOP w12: v1(1825,2130) 1825,2090.83 U1.1@1825.98,2089.84
  L3-PGND/SGND-PLANE w20: v1(1500,2485) 1500,2330 1700,2130 v1(1825,2130)
  L4-BOTTOM w20: v1(1500,2485) R10.1@1500,2520.71
TG2: R11.1 U1.31 | length 648.1
  L1-TOP w10: U1.31@2024.02,2089.84 2024.51,2090.33 2024.51,2090.49 2025,2090.98 v1(2025,2130)
  L3-PGND/SGND-PLANE w20: v1(2025,2130) 2130,2130 2400,2400 v1(2400,2490)
  L4-BOTTOM w20: v1(2400,2490) R11.1@2400,2520.71
TIMER: JP3.2 U1.14 | length 1099.7
  L1-TOP w10: v1(1838,1711) 1838,1764 1885.63,1811.63 U1.14@1885.63,1841.61
  L3-PGND/SGND-PLANE w10: JP3.2@1504,900 1504,1261 1838,1595 v1(1838,1711)
VC: C29.1 R37.1 TP19.1 U1.28 | length 334.9
  L1-TOP w10: U1.28@2024.02,2029.21 2044.21,2029.21 2074,2059 2096,2059 2110,2073 2110,2110 2145,2145 C29.1@2148.5,2145 ; TP19.1@2085,2250 2136,2199 2149.5,2199 R37.1@2150,2198.5
  L1-TOP w15: C29.1@2148.5,2145 2148.5,2198 2149.01,2198.5 R37.1@2149.5,2199
VFB: C20.2 R21.2 R25.1 TP13.1 U1.17 | length 334.7
  L1-TOP w10: TP13.1@1797,1609 1845,1657 1847.98,1657 1851.84,1653.13 R21.2@1861,1657.5 C20.2@1911,1657.5 1911,1703.48 R25.1@1909.61,1704.87 ; R25.1@1909.5,1706 1912.98,1719.41 1912.98,1737.98 1944.68,1769.68 U1.17@1944.68,1841.61
  L1-TOP w15: R25.1@1909.5,1706 R25.1@1909.61,1704.87
VFBMAX: C21.2 R1.2 R22.2 R26.1 TP12.1 U1.26 | length 928.5
  L1-TOP w10: v1(2015,1670) R1.2@2050.71,1670 ; v1(2024,1530) C21.2@2024,1566.5 ; U1.26@2024.02,1989.84 2068,1989.84 2068,1990 v1(2086,2008)
  L1-TOP w12: R26.1@1973,1566.5 C21.2@2024,1566.5 R22.2@2074,1566.5 ; v1(2024,1530) 2024,1516 TP12.1@2060,1480
  L3-PGND/SGND-PLANE w10: v1(2024,1530) 2024,1589 2015,1598 v1(2015,1670) 2015,1791 2046,1822 2046,1933 2067,1954 2128,1954 2142,1968 2142,1999 2133,2008 v1(2086,2008)
VFBMIN: R1.1 R20.2 R27.1 U1.19 | length 233.3
  L1-TOP w10: U1.19@1985.63,1841.61 1985.63,1809.37 v1(2050,1745) R27.1@2049.29,1705 R20.2@2080.71,1705 2085,1700.71 2085,1674.29 R1.1@2089.29,1670
VIN: C2.1 C4.1 C5.1 C6.1 C7.1 E1.1 J1.1 R2.1 R3.1 R8.1 R9.1 U1.7 | length 4949.3
  L1-TOP w10: R2.1@1268.66,3210 1290,3210 v1(1290,3115) ; v1(1558,2005) 1593,1970.16 U1.7@1825.98,1970.16
  L1-TOP w20: v1(1669,1905) 1699.71,1905 R8.1@1700.71,1904 ; v1(1673,2299) 1750,2299 R3.1@1750,2300 ; v1(1692,1765) 1692.29,1764.71 R9.1@1728,1764.71
  L3-PGND/SGND-PLANE w10: v1(1290,3115) 1300,3105 1300,2995 1220,2915 1220,2343 1244.8,2318.2 v1(1558,2005)
  L3-PGND/SGND-PLANE w20: v1(475,3275) 475,2650 575,2550 v1(575,2025)
  L4-BOTTOM w20: v1(575,2025) 624,1976 1432,1976 ; v1(1673,2299) 1572,2299 1453,2180 1453,1998 ; v1(1692,1765) 1669,1788 v1(1669,1905) 1572,1905 1501,1976 1471,1976 ; 1432,1976 1453,1997 ; 1432,1976 1453,1976 ; 1453,1976 1453,1997 ; 1453,1976 1471,1976 ; 1453,1997 1453,1998 ; 1453,1998 1471,1980 1471,1976
VINREG: R9.2 R13.1 U1.10 | length 189.9
  L1-TOP w10: R9.2@1728,1803.29 R13.1@1765,1803.29 1765,1884 1792.1,1911.1 U1.10@1825.98,1911.1
VOUT: C9.1 C12.1 C13.1 C14.1 C15.1 D4.1 E4.1 J3.1 Q2.5 Q2.6 R6.2 R17.1 R20.1 R34.1 TP6.1 | length 4215
  L1-TOP w10: R17.1@2124,1566.5 2125,1565.5 v1(2125,1499) ; v1(3060,2080) R34.1@3060,2114.06
  L1-TOP w12: v1(2205,1767) R6.2@2205,1796.71
  L1-TOP w20: R20.1@2119.29,1705 2121.29,1707 v1(2149,1707)
  L3-PGND/SGND-PLANE w10: v1(2205,1767) 2519,1767 2580,1706 2935,1706 3099,1870 3099,2027 3076,2050 3076,2064 v1(3060,2080)
  L3-PGND/SGND-PLANE w20: v1(2779,1499) 2814,1499 3160,1845 3160,3080 3080,3160 v1(2985,3160)
  L4-BOTTOM w20: v1(2149,1707) 2149,1652 2125,1628 v1(2125,1499) v1(2779,1499)
  other v1: 3030,2185 3060,2185 3090,2185 3030,2215 3060,2215 3090,2215 3030,2245 3060,2245 3090,2245 2925,3160 2955,3160 2925,3190 2955,3190 2985,3190 2925,3220 2955,3220 2985,3220 2540,3280 2585,3280 2540,3390 2585,3390
pads on no net: H1.1 H2.1 MP1.1 MP2.1 MP3.1 MP4.1 Z1.2
copper on no net: | length 582.7
  L1-TOP w12: 1925,2061 1925,2126
  L3-PGND/SGND-PLANE w8: 1491.19,1668 ccw(c1450,1668) 1491.19,1668
  L4-BOTTOM w8: 1491.19,1668 ccw(c1450,1668) 1491.19,1668

## Polygon pours and split planes (outlines as drawn)
VOUT on L1-TOP "L1-TOP-VOUT" (solid, remove dead copper, pour order 20): 2995,2285 3005,2295 3110,2295 3120,2285 3120,2075 3110,2065 3005,2065 2995,2075
SW1 on L1-TOP "L1-TOP-SW1" (solid, remove dead copper, pour order 6): 1438,3330 1428,3340 1428,4080 1890,4080 1890,3115 1875,3100 1535,3100 1535,3320 1525,3330
VIN on L1-TOP "L1-TOP-VIN" (solid, remove dead copper, pour order 8): 75,3950 65,3940 65,3110 75,3100 1290,3100 1300,3110 1300,3940 1290,3950
QAD on L1-TOP "L1-TOP-QAD" (solid, remove dead copper, pour order 19): 1320,3305 1330,3315 1505,3315 1515,3305 1515,3100 1330,3100 1320,3110
GND_SIGNAL on L1-TOP "L1-TOP-GND_SIGNAL" (solid, remove dead copper, pour order 10): 25,1975 1825,1975 1825,2100 1953,2100 1953,2331 1963,2341 2580,2341 2600,2321 2600,25 25,25
BAT on L1-TOP "L1-TOP-BAT" (solid, remove dead copper, pour order 9): 2800,1741 3769,1741 3785,1725 3785,1145 3775,1135 2810,1135 2800,1145
N16621792 on L1-TOP "L1-TOP-N16621792" (solid, remove dead copper, pour order 14): 2966,1757 2956,1767 2956,2045 2966,2055 3110,2055 3120,2045 3120,1767 3110,1757
GND_POWER on L1-TOP "L1-TOP-GND_POWER" (solid, remove dead copper, pour order 21): 3825,4450 25,4450 25,25 3825,25
N16590650 on L1-TOP "L1-TOP-N16590650" (solid, remove dead copper, pour order 5): 1320,2990 1325,2995 1510,2995 1520,3005 1520,3080 1580,3080 1580,2835 1565,2820 1320,2820
N16771108 on L1-TOP "L1-TOP-N16771108" (solid, remove dead copper, pour order 4): 1959,4075 1959,3495 2225,3495 2225,3610 2240,3625 2495,3625 2505,3635 2505,4075
SW2 on L1-TOP "L1-TOP-SW2" (solid, remove dead copper, pour order 1): 2505,3580 2495,3590 2255,3590 2245,3580 2245,3485 2235,3475 1969,3475 1959,3465 1959,3115 1974,3100 2315,3100 2315,3310 2320,3315 2495,3315 2505,3325
VOUT on L1-TOP "L1-TOP-VOUT 1" (solid, remove dead copper, pour order 0): 2343,3100 2333,3110 2333,3300 2338,3305 2510,3305 2520,3315 2520,3940 2530,3950 3775,3950 3785,3940 3785,3110 3775,3100
SW1 on L4-BOTTOM "L4-BOTTOM-SW1" (solid, remove dead copper, pour order 18): 1445,3370 1445,3220 1420,3195 1395,3195 1390,3190 1390,3040 1425,3005 1465,3005 1475,3015 1475,3095 1515,3135 1515,3185 1535,3205 1708,3205 1718,3215 1718,3297 1645,3370
GND_POWER on L4-BOTTOM "L4-BOTTOM-GND_POWER" (solid, remove dead copper, pour order 17): 3825,4450 25,4450 25,25 3825,25
VOUT on L4-BOTTOM "L4-BOTTOM-VOUT" (solid, remove dead copper, pour order 16): 2510,3410 2615,3410 2615,3260 2510,3260
QAD on L4-BOTTOM "L4-BOTTOM-QAD" (solid, remove dead copper, pour order 15): 1360,3365 1435,3365 1435,3221 1420,3206 1360,3206
INTVCC on L4-BOTTOM "L4-BOTTOM-INTVCC" (solid, remove dead copper, pour order 12): 1834,2324 1840,2330 2011,2330 2016,2325 2016,2255 2001,2240 1848,2240 1834,2254
N16591456 on L4-BOTTOM "L4-BOTTOM-N16591456" (solid, remove dead copper, pour order 11): 2095,3380 2245,3380 2245,3295 2095,3295
SW2 on L4-BOTTOM "L4-BOTTOM-SW2" (solid, remove dead copper, pour order 7): 2265,3385 2330,3450 2430,3450 2440,3440 2440,3295 2265,3295
N16590650 on L4-BOTTOM "L4-BOTTOM-N16590650" (solid, remove dead copper, pour order 2): 1655,3195 1540,3195 1525,3180 1525,2950 1535,2940 1645,2940 1655,2950
GND_POWER on L3-PGND/SGND-PLANE "L3-PGND/SGND-PLANE-GND_POWER" (solid, remove dead copper, pour order 13): 3825,4450 25,4450 25,25 3825,25
VOUT on L3-PGND/SGND-PLANE "L3-PGND/SGND-PLANE-VOUT" (solid, remove dead copper, pour order 3): 3120,2170 3105,2155 3000,2155 2875,2280 2875,3255 3040,3255 3040,2360 3120,2280
GND_SIGNAL on L2- PGND/SGND-PLANE (split plane): 2594.9,2202.89 2594.9,30.1 30.1,30.1 30.1,1969.9 1775,1969.9 1776.95,1970.29 1778.6,1971.4 1798.6,1991.4 1799.71,1993.05 1800.1,1995 1800.1,2077.89 1817.11,2094.9 2030,2094.9 2031.95,2095.29 2033.6,2096.4 2053.6,2116.4 2054.71,2118.05 2055.1,2120 2055.1,2192.89 2072.11,2209.9 2587.89,2209.9
GND_POWER on L2- PGND/SGND-PLANE (split plane): 3819.9,30.1 2605.1,30.1 2605.1,2205 2604.71,2206.95 2603.6,2208.6 2593.6,2218.6 2591.95,2219.71 2590,2220.1 2070,2220.1 2068.05,2219.71 2066.4,2218.6 2046.4,2198.6 2045.29,2196.95 2044.9,2195 2044.9,2122.11 2027.89,2105.1 1815,2105.1 1813.05,2104.71 1811.4,2103.6 1791.4,2083.6 1790.29,2081.95 1789.9,2080 1789.9,1997.11 1772.89,1980.1 30.1,1980.1 30.1,4444.9 3819.9,4444.9
SW2 on L2- PGND/SGND-PLANE (split plane): 2369.9,3142.89 2369.9,2975.1 2330.1,2975.1 2330.1,3085 2329.71,3086.95 2328.6,3088.6 2313.6,3103.6 2311.95,3104.71 2310,3105.1 2202.11,3105.1 2190.1,3117.11 2190.1,3207.89 2202.11,3219.9 2292.89,3219.9
SW1 on L2- PGND/SGND-PLANE (split plane): 1706.9,3295.89 1706.9,3203.11 1694.89,3191.1 1598,3191.1 1596.05,3190.71 1594.4,3189.6 1462.4,3057.6 1461.29,3055.95 1460.9,3054 1460.9,3014.1 1440.11,3014.1 1414.1,3040.11 1414.1,3146.89 1575.11,3307.9 1694.89,3307.9

## Keep-outs
L1-TOP:
  region: 1352.2,3115 ccw(c1330,3115) 1330,3137.2 ccw(c1330,3115) 1307.8,3115 ccw(c1330,3115) 1330,3092.8 ccw(c1330,3115)
  region: 1352.2,2815 ccw(c1330,2815) 1330,2837.2 ccw(c1330,2815) 1307.8,2815 ccw(c1330,2815) 1330,2792.8 ccw(c1330,2815)
  region: 3081.26,2080 ccw(c3060,2080) 3060,2101.26 ccw(c3060,2080) 3038.74,2080 ccw(c3060,2080) 3060,2058.74 ccw(c3060,2080)
  region: 1702.02,2084 ccw(c1680,2084) 1680,2106.02 ccw(c1680,2084) 1657.98,2084 ccw(c1680,2084) 1680,2061.98 ccw(c1680,2084)
  region: 3081.26,2030 ccw(c3060,2030) 3060,2051.26 ccw(c3060,2030) 3038.74,2030 ccw(c3060,2030) 3060,2008.74 ccw(c3060,2030)
  region: 1312.2,3115 ccw(c1290,3115) 1290,3137.2 ccw(c1290,3115) 1267.8,3115 ccw(c1290,3115) 1290,3092.8 ccw(c1290,3115)
  region: 1312.2,2815 ccw(c1290,2815) 1290,2837.2 ccw(c1290,2815) 1267.8,2815 ccw(c1290,2815) 1290,2792.8 ccw(c1290,2815)
  region: 1790,1747 1873,1747 1873,1739 1790,1739 1790,1747
  region: 1753,2270 1819,2270 1819,2265 1753,2265 1753,2270
  region: 1830,2256 1858,2256 1858,2216 1830,2216 1830,2256
  region: 2195,2075.5 2215,2075.5 2215,2064.5 2195,2064.5 2195,2075.5
  region: 1847,2094 2011,2094 2011,1860 1847,1860 1847,2094
  region: 1272,3098 2297,3098 2297,3090 1272,3090 1272,3098
  region: 1750.6,2179.2 1757.8,2179.2 1757.8,2137.3 1750.6,2137.3 1750.6,2179.2
  region: 1680,2103.8 1760,2103.8 1760,2070 1680,2070 1680,2103.8
  region: 1723,1960 1729,1960 1729,1753 1723,1753 1723,1960
  region: 1941,3475.5 1941,3478.5 1991,3478.5 1991,3475.5 1941,3475.5
  region: 1417.5,4080 1418.28,4083.9 1420.49,4087.21 1423.8,4089.42 1427.7,4090.2 1427.7,4090 2505,4090.2 2508.9,4089.42 2512.21,4087.21 2514.42,4083.9 2515.2,4080 2515,4080 2515,4075 1417.7,4075 1417.7,4080
  region: 1890,4090 1959,4090 1959,3090 1890,3090 1890,4090
  region: 1710,1887 1725,1887 1725,1820 1710,1820 1710,1887
  region: 1867,1746 1883,1746 1883,1662 1867,1662 1867,1746
  region: 1742,1783 1784,1783 1784,1772 1742,1772 1742,1783
  region: 2175,2075 2195,2075 2195,2020 2175,2020 2175,2075
  region: 3140,2085 3150,2085 3150,1995 3140,1995 3140,2085
  region: 1799,2270 1836,2270 1836,2217 1799,2217 1799,2270
  region: 1758,2069 1811,2069 1811,2021 1758,2021 1758,2069
  region: 2167,2239 2203,2239 2203,2120 2167,2120 2167,2239
  region: 2944,1760 3119,1760 3119,1750 2944,1750 2944,1760
  region: 1296,2989 1324,2989 1324,2832 1296,2832 1296,2989
  region: 2230.5,2070 2277,2070 2277,2048 2240,2048 2240,2065 2211.5,2065 2230.5,2070
  region: 1310,3325 1420,3325 1420,3320 1310,3320 1310,3325
  region: 2170,1920 2190,1920 2190,1855 2170,1855 2170,1920
  region: 1796,2218 1857,2218 1857,2209 1796,2209 1796,2218
  region: 2226.3,2004.2 2237.2,2004.2 2237.2,1933.2 2226.3,1933.2 2226.3,2004.2
L3-PGND/SGND-PLANE:
  region: 1945.88,2060 ccw(c1925,2060) 1925,2080.88 ccw(c1925,2060) 1904.12,2060 ccw(c1925,2060) 1925,2039.12 ccw(c1925,2060)
  region: 1985.88,1940 ccw(c1965,1940) 1965,1960.88 ccw(c1965,1940) 1944.12,1940 ccw(c1965,1940) 1965,1919.12 ccw(c1965,1940)
  region: 1945.88,1900 ccw(c1925,1900) 1925,1920.88 ccw(c1925,1900) 1904.12,1900 ccw(c1925,1900) 1925,1879.12 ccw(c1925,1900)
  region: 1985.88,1900 ccw(c1965,1900) 1965,1920.88 ccw(c1965,1900) 1944.12,1900 ccw(c1965,1900) 1965,1879.12 ccw(c1965,1900)
  region: 2565,200 ccw(c2500,200) 2500,265 ccw(c2500,200) 2435,200 ccw(c2500,200) 2500,135 ccw(c2500,200)
  region: 1905.88,1900 ccw(c1885,1900) 1885,1920.88 ccw(c1885,1900) 1864.12,1900 ccw(c1885,1900) 1885,1879.12 ccw(c1885,1900)
  region: 1945.88,1940 ccw(c1925,1940) 1925,1960.88 ccw(c1925,1940) 1904.12,1940 ccw(c1925,1940) 1925,1919.12 ccw(c1925,1940)
  region: 1985.88,1980 ccw(c1965,1980) 1965,2000.88 ccw(c1965,1980) 1944.12,1980 ccw(c1965,1980) 1965,1959.12 ccw(c1965,1980)
  region: 1985.88,2060 ccw(c1965,2060) 1965,2080.88 ccw(c1965,2060) 1944.12,2060 ccw(c1965,2060) 1965,2039.12 ccw(c1965,2060)
  region: 1945.88,2020 ccw(c1925,2020) 1925,2040.88 ccw(c1925,2020) 1904.12,2020 ccw(c1925,2020) 1925,1999.12 ccw(c1925,2020)
  region: 1905.88,1940 ccw(c1885,1940) 1885,1960.88 ccw(c1885,1940) 1864.12,1940 ccw(c1885,1940) 1885,1919.12 ccw(c1885,1940)
  region: 1905.88,2060 ccw(c1885,2060) 1885,2080.88 ccw(c1885,2060) 1864.12,2060 ccw(c1885,2060) 1885,2039.12 ccw(c1885,2060)
  region: 1945.88,1980 ccw(c1925,1980) 1925,2000.88 ccw(c1925,1980) 1904.12,1980 ccw(c1925,1980) 1925,1959.12 ccw(c1925,1980)
  region: 1985.88,2020 ccw(c1965,2020) 1965,2040.88 ccw(c1965,2020) 1944.12,2020 ccw(c1965,2020) 1965,1999.12 ccw(c1965,2020)
  region: 1905.88,1980 ccw(c1885,1980) 1885,2000.88 ccw(c1885,1980) 1864.12,1980 ccw(c1885,1980) 1885,1959.12 ccw(c1885,1980)
  region: 1905.88,2020 ccw(c1885,2020) 1885,2040.88 ccw(c1885,2020) 1864.12,2020 ccw(c1885,2020) 1885,1999.12 ccw(c1885,2020)
  region: 890,200 ccw(c825,200) 825,265 ccw(c825,200) 760,200 ccw(c825,200) 825,135 ccw(c825,200)
  region: 1293,2825.5 1331,2825.5 1331,2820.5 1293,2820.5 1293,2825.5
L4-BOTTOM:
  region: 1702.02,2084 ccw(c1680,2084) 1680,2106.02 ccw(c1680,2084) 1657.98,2084 ccw(c1680,2084) 1680,2061.98 ccw(c1680,2084)
  region: 1985.88,2020 ccw(c1965,2020) 1965,2040.88 ccw(c1965,2020) 1944.12,2020 ccw(c1965,2020) 1965,1999.12 ccw(c1965,2020)
  region: 1905.88,1940 ccw(c1885,1940) 1885,1960.88 ccw(c1885,1940) 1864.12,1940 ccw(c1885,1940) 1885,1919.12 ccw(c1885,1940)
  region: 1312.2,2815 ccw(c1290,2815) 1290,2837.2 ccw(c1290,2815) 1267.8,2815 ccw(c1290,2815) 1290,2792.8 ccw(c1290,2815)
  region: 2565,200 ccw(c2500,200) 2500,265 ccw(c2500,200) 2435,200 ccw(c2500,200) 2500,135 ccw(c2500,200)
  region: 1985.88,1940 ccw(c1965,1940) 1965,1960.88 ccw(c1965,1940) 1944.12,1940 ccw(c1965,1940) 1965,1919.12 ccw(c1965,1940)
  region: 1945.88,2020 ccw(c1925,2020) 1925,2040.88 ccw(c1925,2020) 1904.12,2020 ccw(c1925,2020) 1925,1999.12 ccw(c1925,2020)
  region: 1985.88,1980 ccw(c1965,1980) 1965,2000.88 ccw(c1965,1980) 1944.12,1980 ccw(c1965,1980) 1965,1959.12 ccw(c1965,1980)
  region: 1905.88,2060 ccw(c1885,2060) 1885,2080.88 ccw(c1885,2060) 1864.12,2060 ccw(c1885,2060) 1885,2039.12 ccw(c1885,2060)
  region: 1905.88,2020 ccw(c1885,2020) 1885,2040.88 ccw(c1885,2020) 1864.12,2020 ccw(c1885,2020) 1885,1999.12 ccw(c1885,2020)
  region: 1945.88,1900 ccw(c1925,1900) 1925,1920.88 ccw(c1925,1900) 1904.12,1900 ccw(c1925,1900) 1925,1879.12 ccw(c1925,1900)
  region: 1905.88,1980 ccw(c1885,1980) 1885,2000.88 ccw(c1885,1980) 1864.12,1980 ccw(c1885,1980) 1885,1959.12 ccw(c1885,1980)
  region: 1945.88,2060 ccw(c1925,2060) 1925,2080.88 ccw(c1925,2060) 1904.12,2060 ccw(c1925,2060) 1925,2039.12 ccw(c1925,2060)
  region: 1985.88,2060 ccw(c1965,2060) 1965,2080.88 ccw(c1965,2060) 1944.12,2060 ccw(c1965,2060) 1965,2039.12 ccw(c1965,2060)
  region: 1985.88,1900 ccw(c1965,1900) 1965,1920.88 ccw(c1965,1900) 1944.12,1900 ccw(c1965,1900) 1965,1879.12 ccw(c1965,1900)
  region: 1945.88,1940 ccw(c1925,1940) 1925,1960.88 ccw(c1925,1940) 1904.12,1940 ccw(c1925,1940) 1925,1919.12 ccw(c1925,1940)
  region: 1945.88,1980 ccw(c1925,1980) 1925,2000.88 ccw(c1925,1980) 1904.12,1980 ccw(c1925,1980) 1925,1959.12 ccw(c1925,1980)
  region: 1905.88,1900 ccw(c1885,1900) 1885,1920.88 ccw(c1885,1900) 1864.12,1900 ccw(c1885,1900) 1885,1879.12 ccw(c1885,1900)
  region: 890,200 ccw(c825,200) 825,265 ccw(c825,200) 760,200 ccw(c825,200) 825,135 ccw(c825,200)
  region: 2220,3390 2260,3390 2260,3385 2220,3385 2220,3390
  region: 2425,3385 2510,3385 2510,3285 2425,3285 2425,3385
  region: 2220,3290 2270,3290 2270,3285 2220,3285 2220,3290
  region: 2075,3355 2105,3355 2105,3315 2075,3315 2075,3355
Keep-Out Layer:
  the board outline again, w10

## Other copper
L1-TOP:
  region net SW1: 1409,3087 1465,3087 1465,3008 1440,3008 1409,3039 1409,3087
  text "LAYER 1 - TOP SIDE" at 1365,-375 h125
L3-PGND/SGND-PLANE:
  pour cut-out: 1694.1,2089.8 1694.1,2026 1676.1,2008 1638.6,2008 1586.8,2059.8 1586.8,2081.2 1285,2383 1285,2821 1304,2821 1314,2811 1314,2397.9 1649,2062.9 1662.8,2062.9 1662.8,2100.3 1693.8,2100.3 1693.8,2089.8 1694.1,2089.8
  text "LAYER 3 - GND PLANE/TRACE" at 1115,-375 h125
L4-BOTTOM:
  text "LAYER 4- BOTTOM SIDE" at 1265,-375 h125
L2- PGND/SGND-PLANE (plane layer: these items are gaps in the copper):
  region: 3850,0 0,0 0,4475 3850,4475 hole: 3825,4450 25,4450 25,1975 25,25 3825,25
  lines w10: 25,25 3825,25 3825,4450 25,4450 25,25 ; 25,25 25,1975 1775,1975 1795,1995 1795,2080 1815,2100 2030,2100 2050,2120 2050,2195 2070,2215 2590,2215 2600,2205 2600,25 25,25 ; 1409,3038 1409,3149 1573,3313 1697,3313 1712,3298 1712,3201 1697,3186 1598,3186 1466,3054 1466,3009 1438,3009 1409,3038 ; 2185,3115 2200,3100 2310,3100 2325,3085 2325,2970 2375,2970 2375,3145 2295,3225 2200,3225 2185,3210 2185,3115
  text "LAYER 2 - GND PLANE" at 1315,-375 h125
Multi-Layer:
  text "DC2044B_REV01" at 1465,-550 h125

## Silkscreen, mask and mechanical layers (free items; w line width, h text height)
Silkscreen Top:
  drawing of 1009 lines, arcs and shapes, not listed
  text "ANALOG" at 601.13,4353.31 h55.43
  text "DEVICES" at 595.5,4267.43 h55.43
  text "P" at 642.39,4173.31 h28
  text "O" at 690.39,4173.31 h28
  text "W" at 746.39,4173.31 h28
  text "E" at 810.39,4173.31 h28
  text "R" at 858.39,4173.31 h28
  text "B" at 926.39,4173.31 h28
  text "Y" at 974.39,4173.31 h28
  text "TM" at 1010.39,4041.31 h20
  text "WWW.ANALOG.COM" at 431.84,3969.92 h32.5
  text "1" at 236.1,1555.52 h43.31 r90
  text "cm" at 241.1,1259.52 h49.21 r90
  text "LTC4020" at 75,720 h115
  text "HIGH VOLTAGE BUCK/BOOST" at 75,630 h90
  text "MULTI-CHEMISTRY BATTERY CHARGER" at 75,540 h90
  text "DEMO CIRCUIT 2044B" at 75,435 h115
  text "TOP SILKSCREEN" at 1440,-375 h125
Silkscreen Bottom:
  text "FOR ADI CUSTOMER USE ONLY" at 2650,4350 h100
  text "REV01" at 3475,75 h100
  text "BOTTOM SILKSCREEN" at 1315,-375 h125
Paste Mask Top:
  text "PASTEMASK TOP" at 1415,-375 h125
Paste Mask Bottom:
  text "PASTEMASK BOTTOM" at 1315,-375 h125
Solder Mask Top:
  region: 2652.5,3480 ccw(c2600,3480) 2600,3532.5 ccw(c2600,3480) 2547.5,3480 ccw(c2600,3480) 2600,3427.5 ccw(c2600,3480)
  region: 2652.5,3860 ccw(c2600,3860) 2600,3912.5 ccw(c2600,3860) 2547.5,3860 ccw(c2600,3860) 2600,3807.5 ccw(c2600,3860)
  region: 990,3140 1225,3140 1225,3235 990,3235 990,3140
  region: 1840,3495 1840,4016 1653.5,4016 1653.5,3495 1840,3495
  region: 2455,3140 2670,3140 2670,3235 2455,3235 2455,3140
  region: 2197,3495 2197,4016 2010.5,4016 2010.5,3495 2197,3495
  text "SOLDERMASK TOP" at 1365,-375 h125
Solder Mask Bottom:
  region: 2652.43,3860 ccw(c2600,3860) 2600,3912.43 ccw(c2600,3860) 2547.57,3860 ccw(c2600,3860) 2600,3807.57 ccw(c2600,3860)
  region: 2652.43,3480 ccw(c2600,3480) 2600,3532.43 ccw(c2600,3480) 2547.57,3480 ccw(c2600,3480) 2600,3427.57 ccw(c2600,3480)
  text "SOLDERMASK BOTTOM" at 1265,-375 h125